# Altium PCB MB1367.PcbDoc (part 1 of 6)
Units mm, origin at the board's own origin, x right, y up, seen from the top; angles counter-clockwise.
Board outline 70 x 82.5 mm, 4 copper layers (Top Layer, Signal Layer 1, Signal Layer 2, Bottom Layer), stack 1.614 mm thick; 192 components, 143 nets, 810 pads, 920 vias.
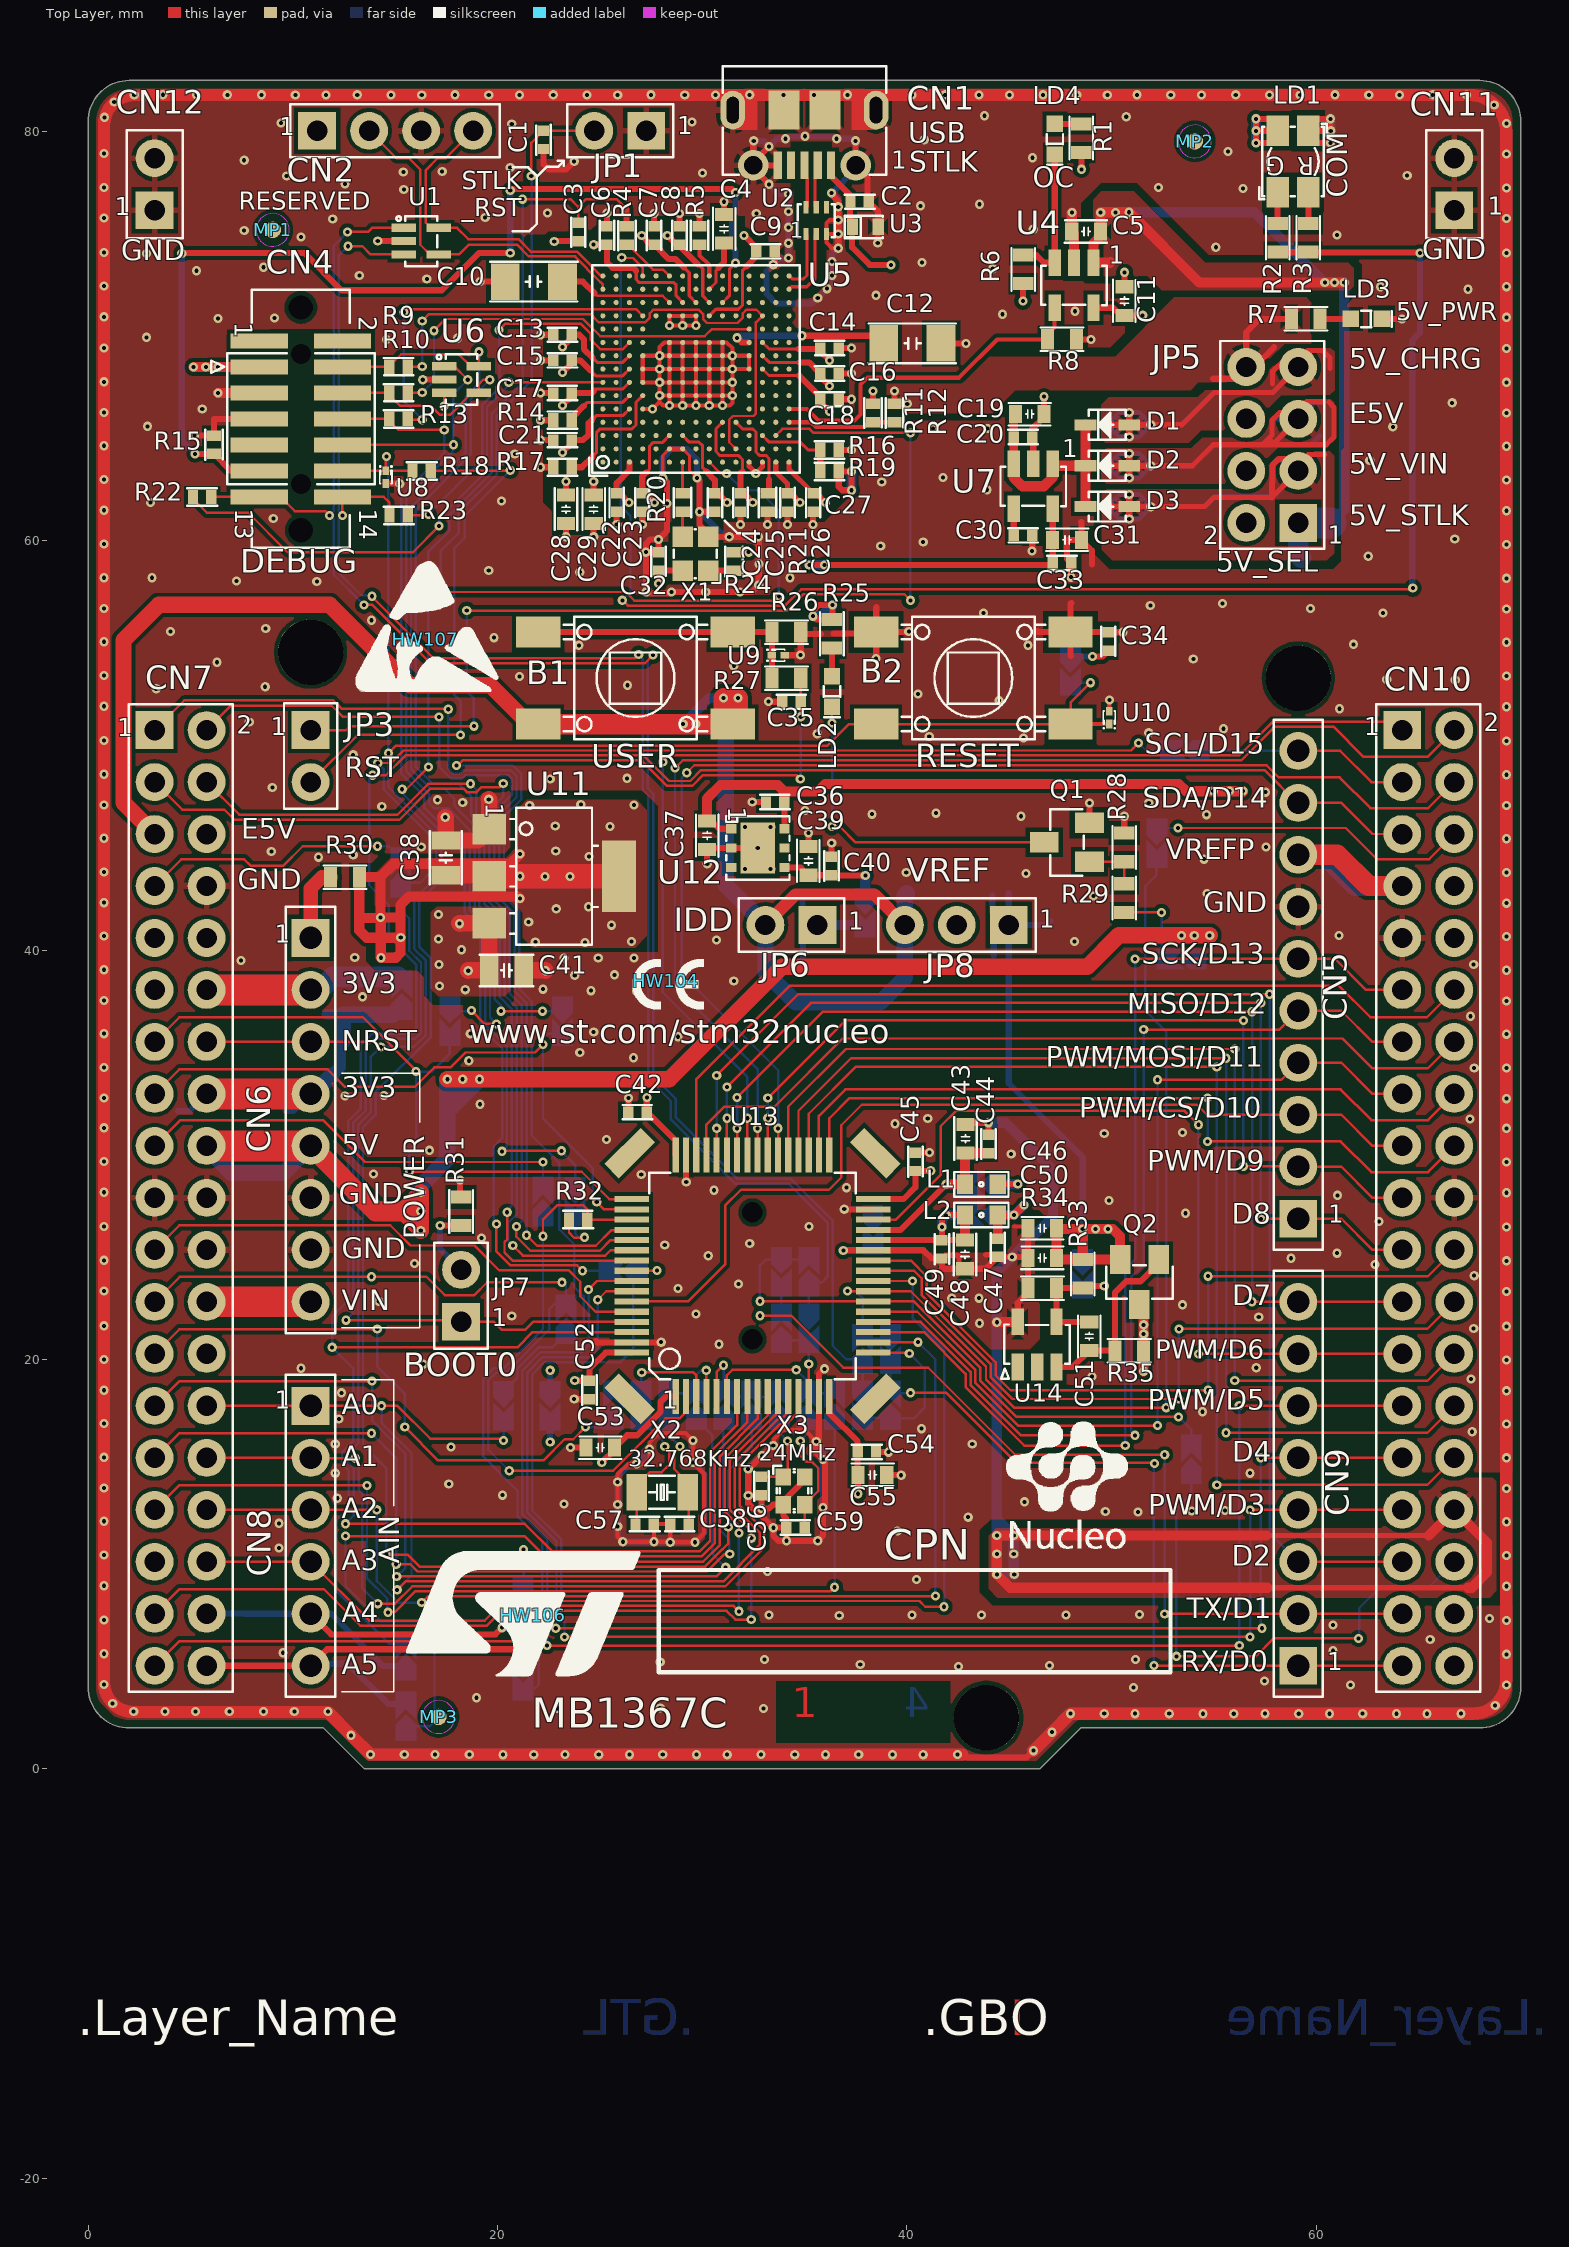
[diagram p0: Top Layer view]
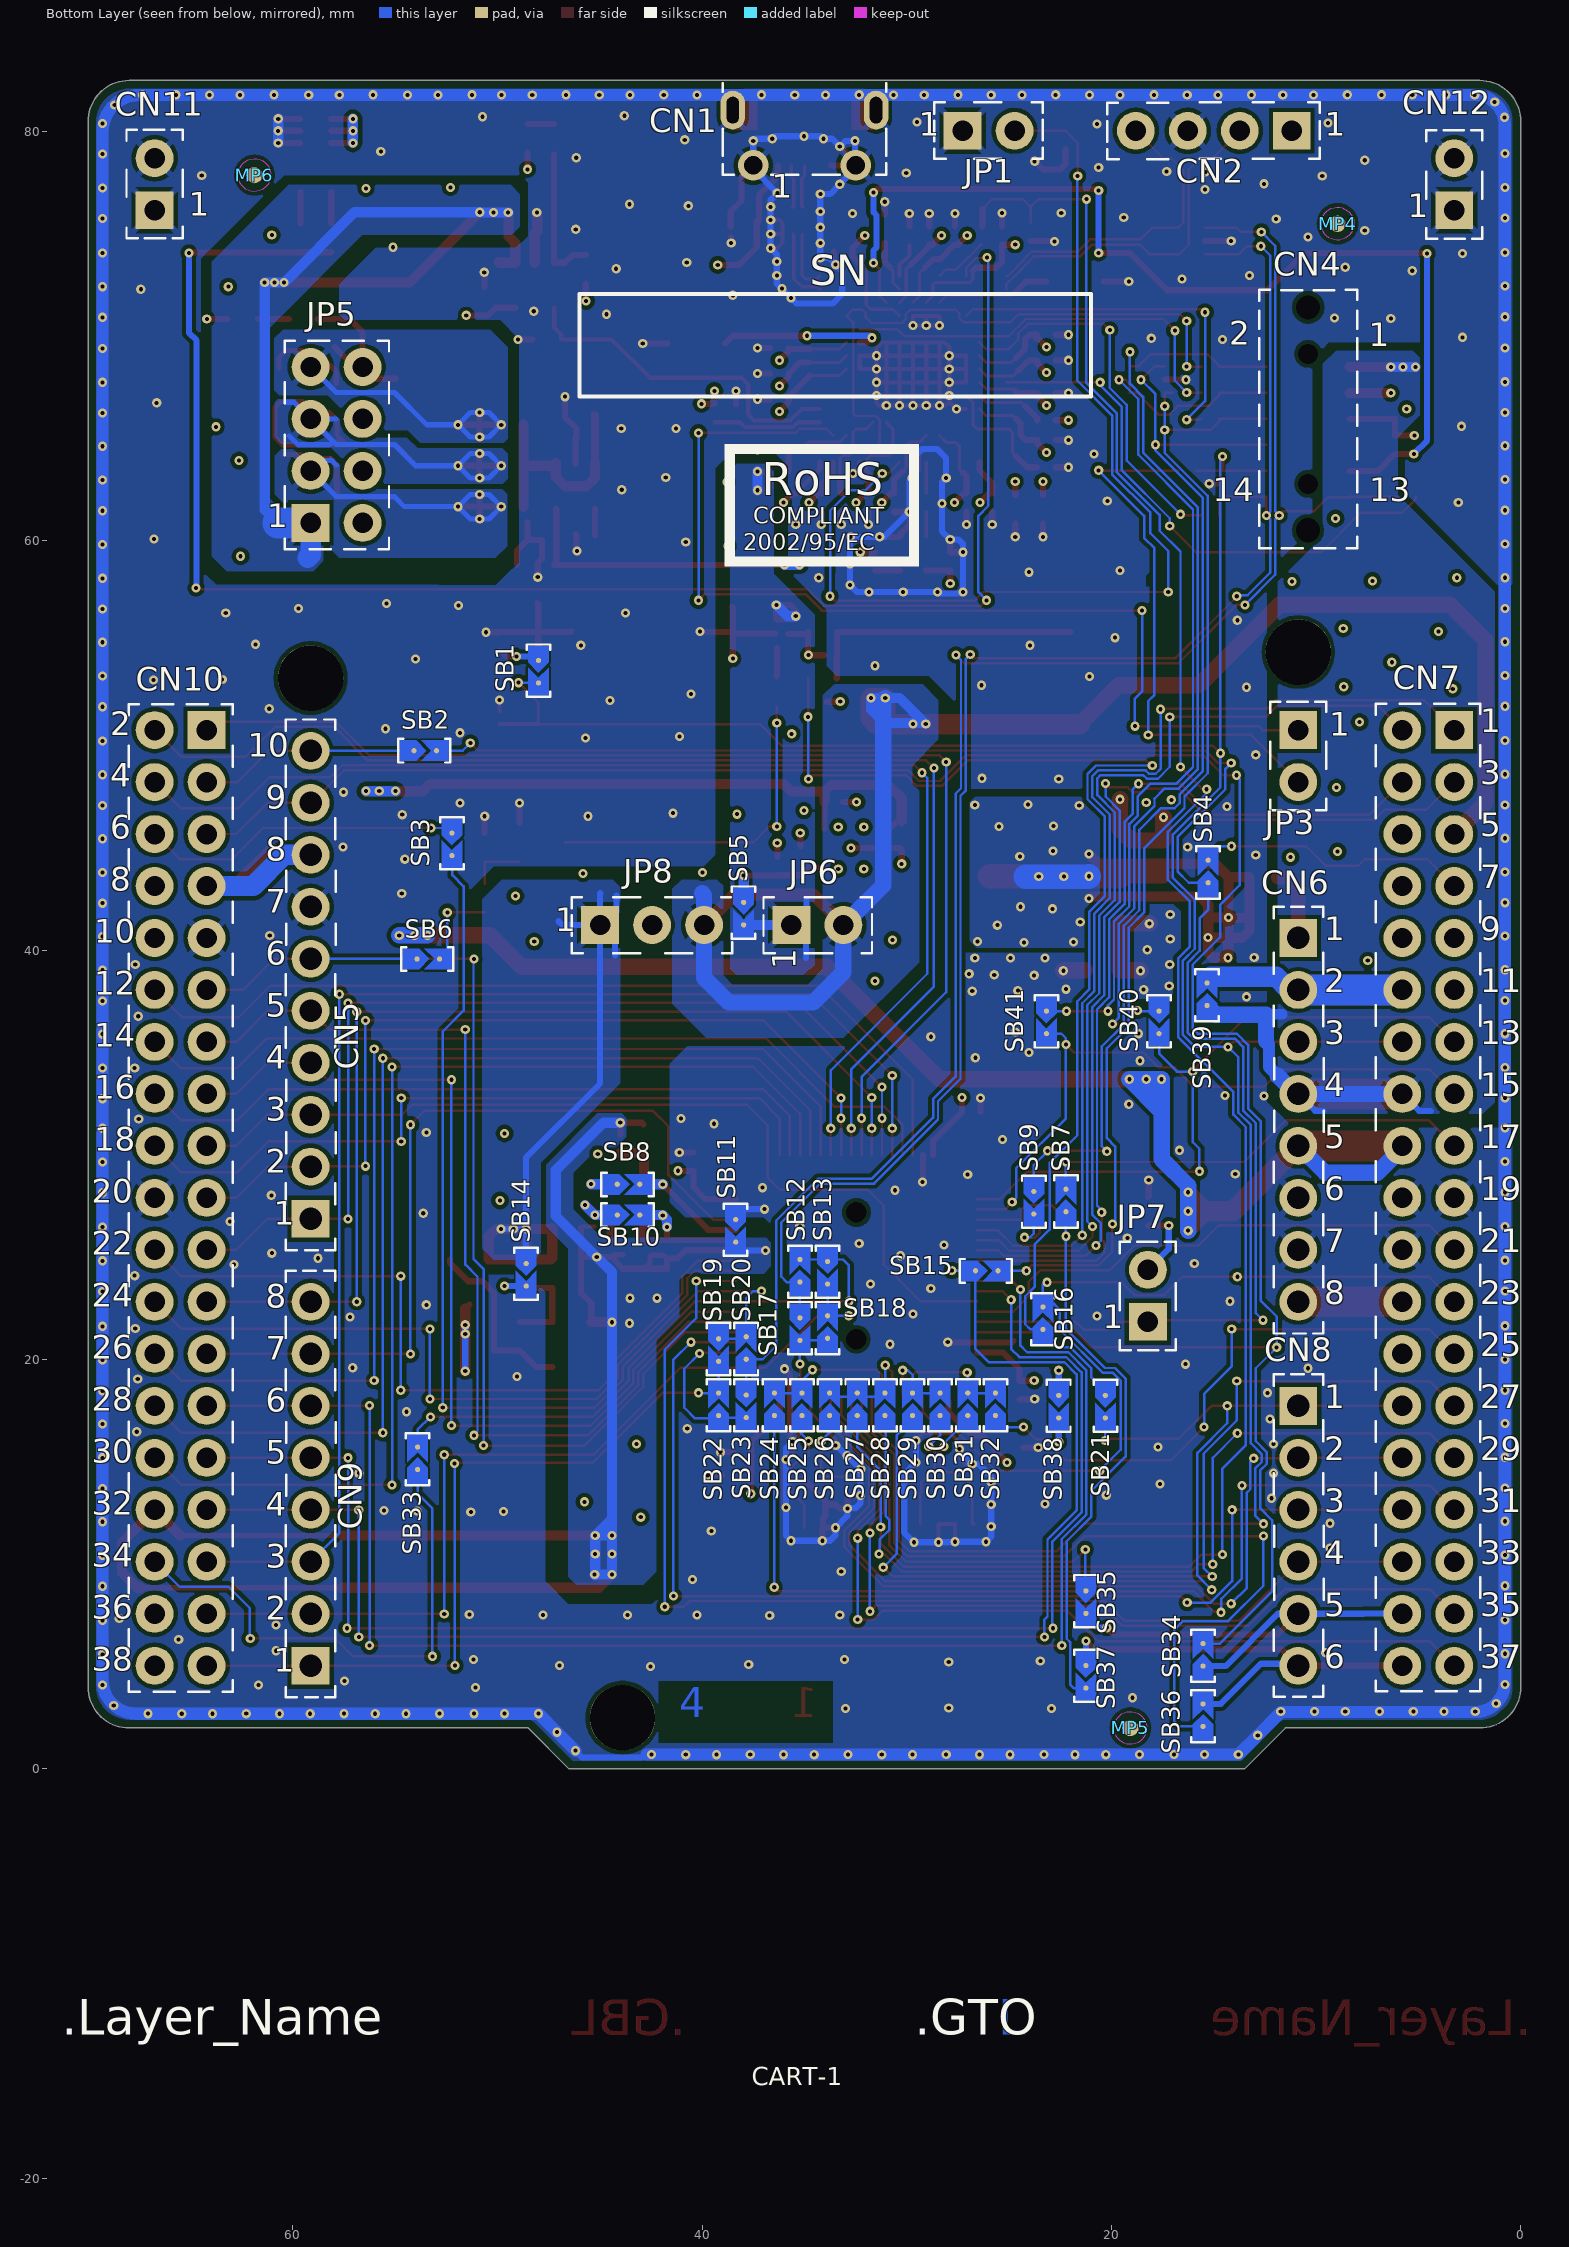
[diagram p1: Bottom Layer view, seen from below]
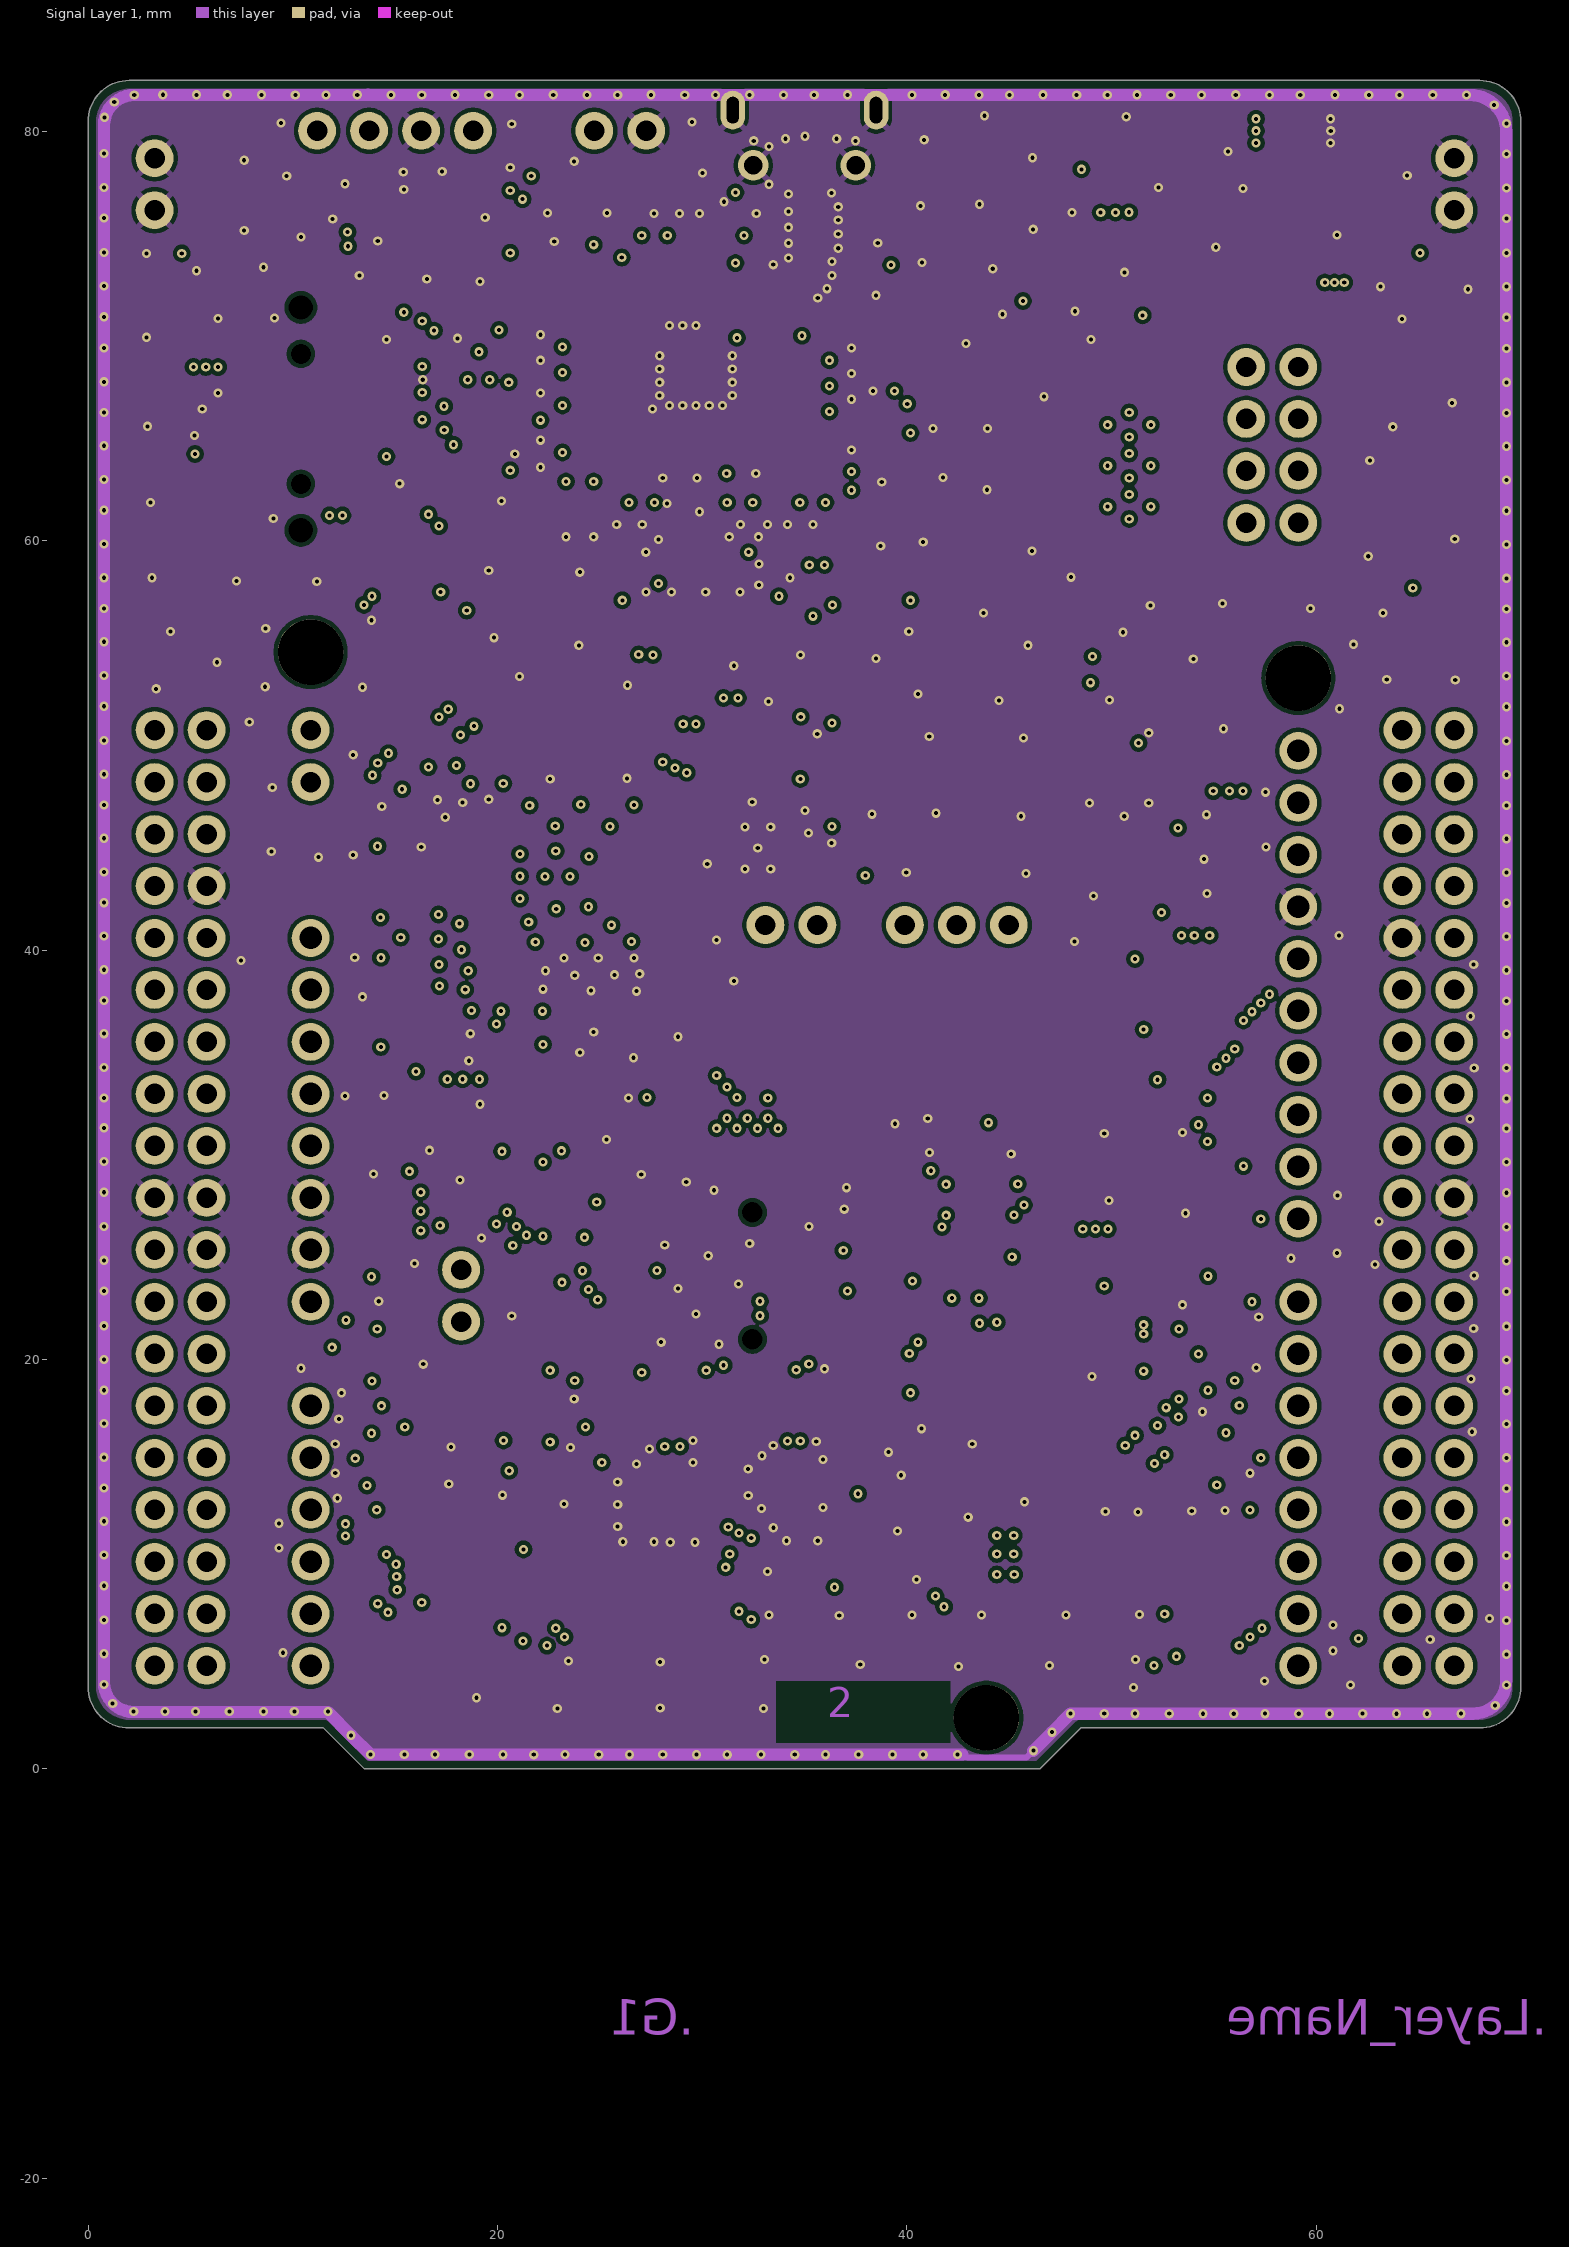
[diagram p2: Signal Layer 1]
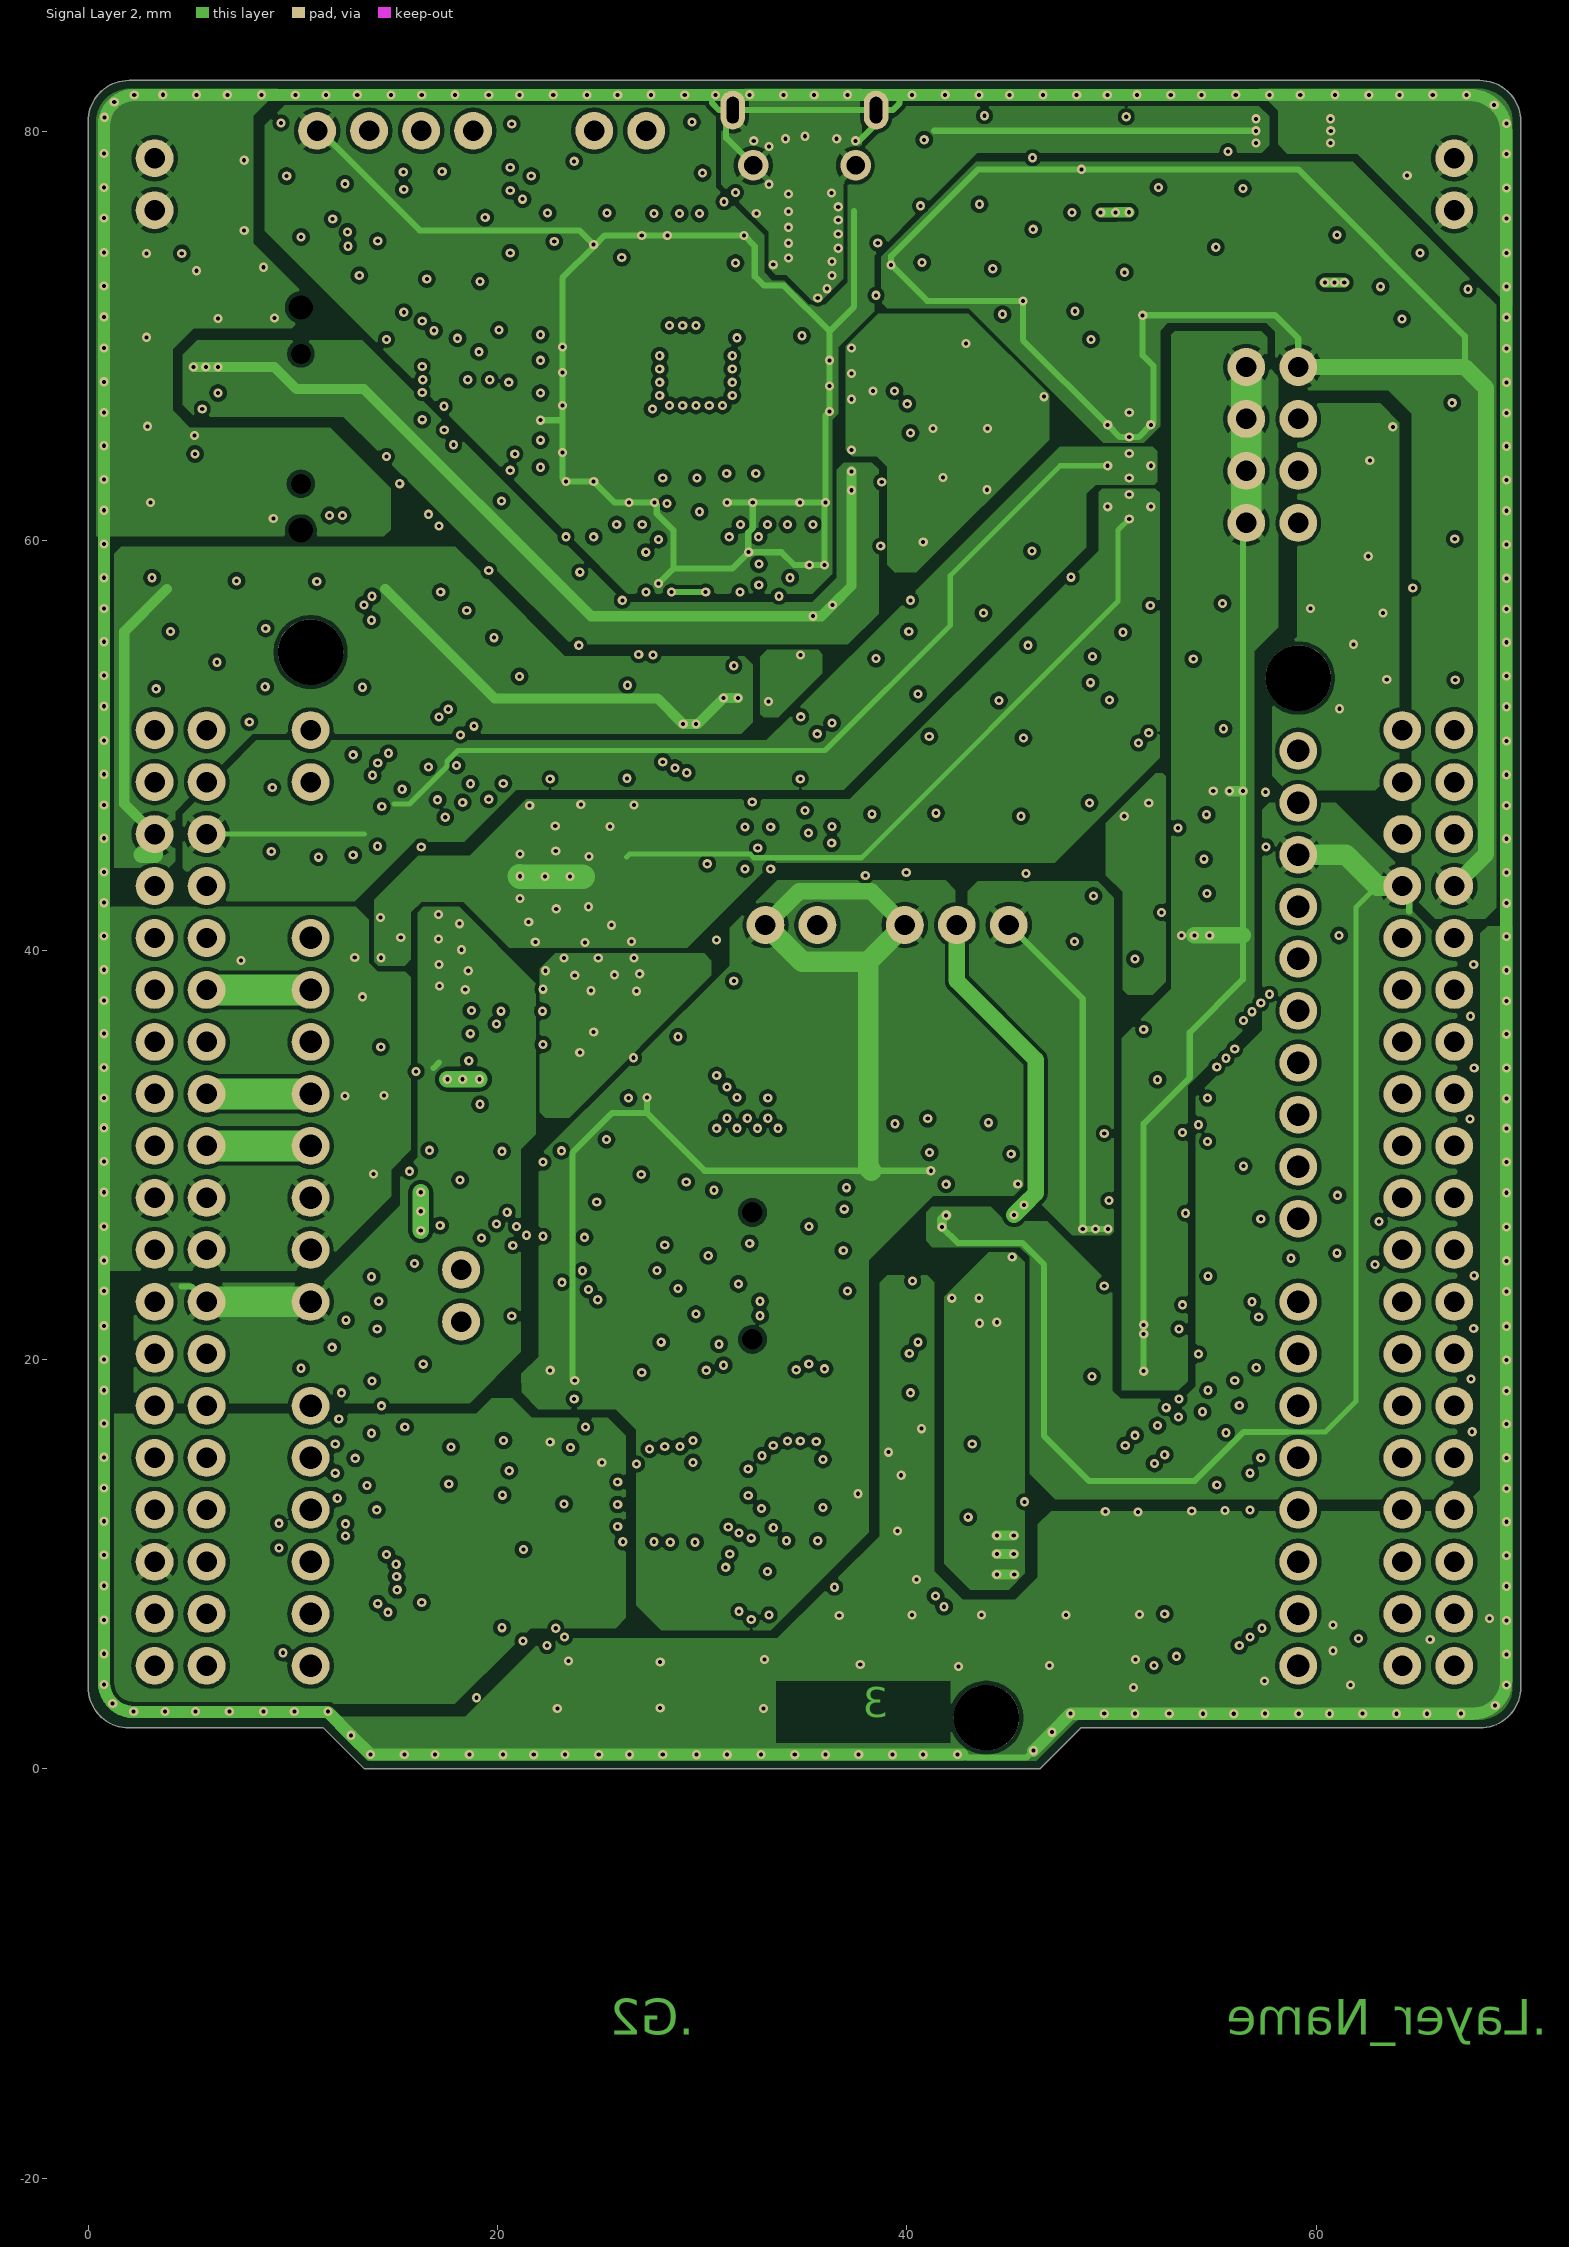
[diagram p3: Signal Layer 2]
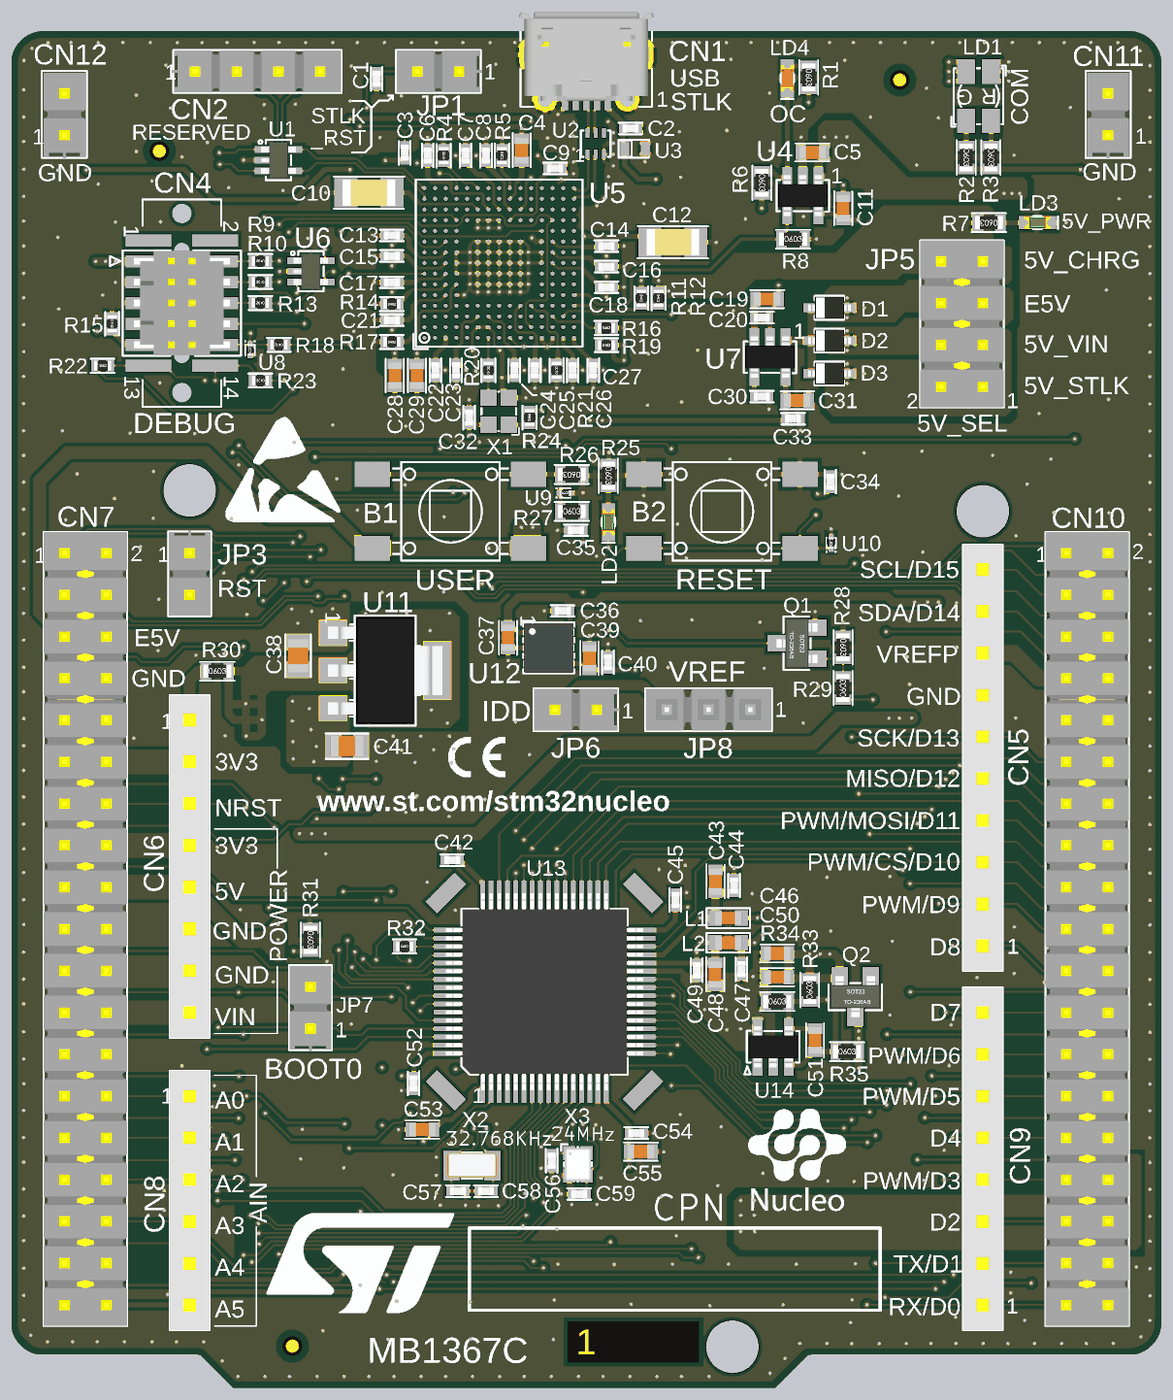
[diagram p8: 3D render of the assembled board from above, using the file's embedded part models]
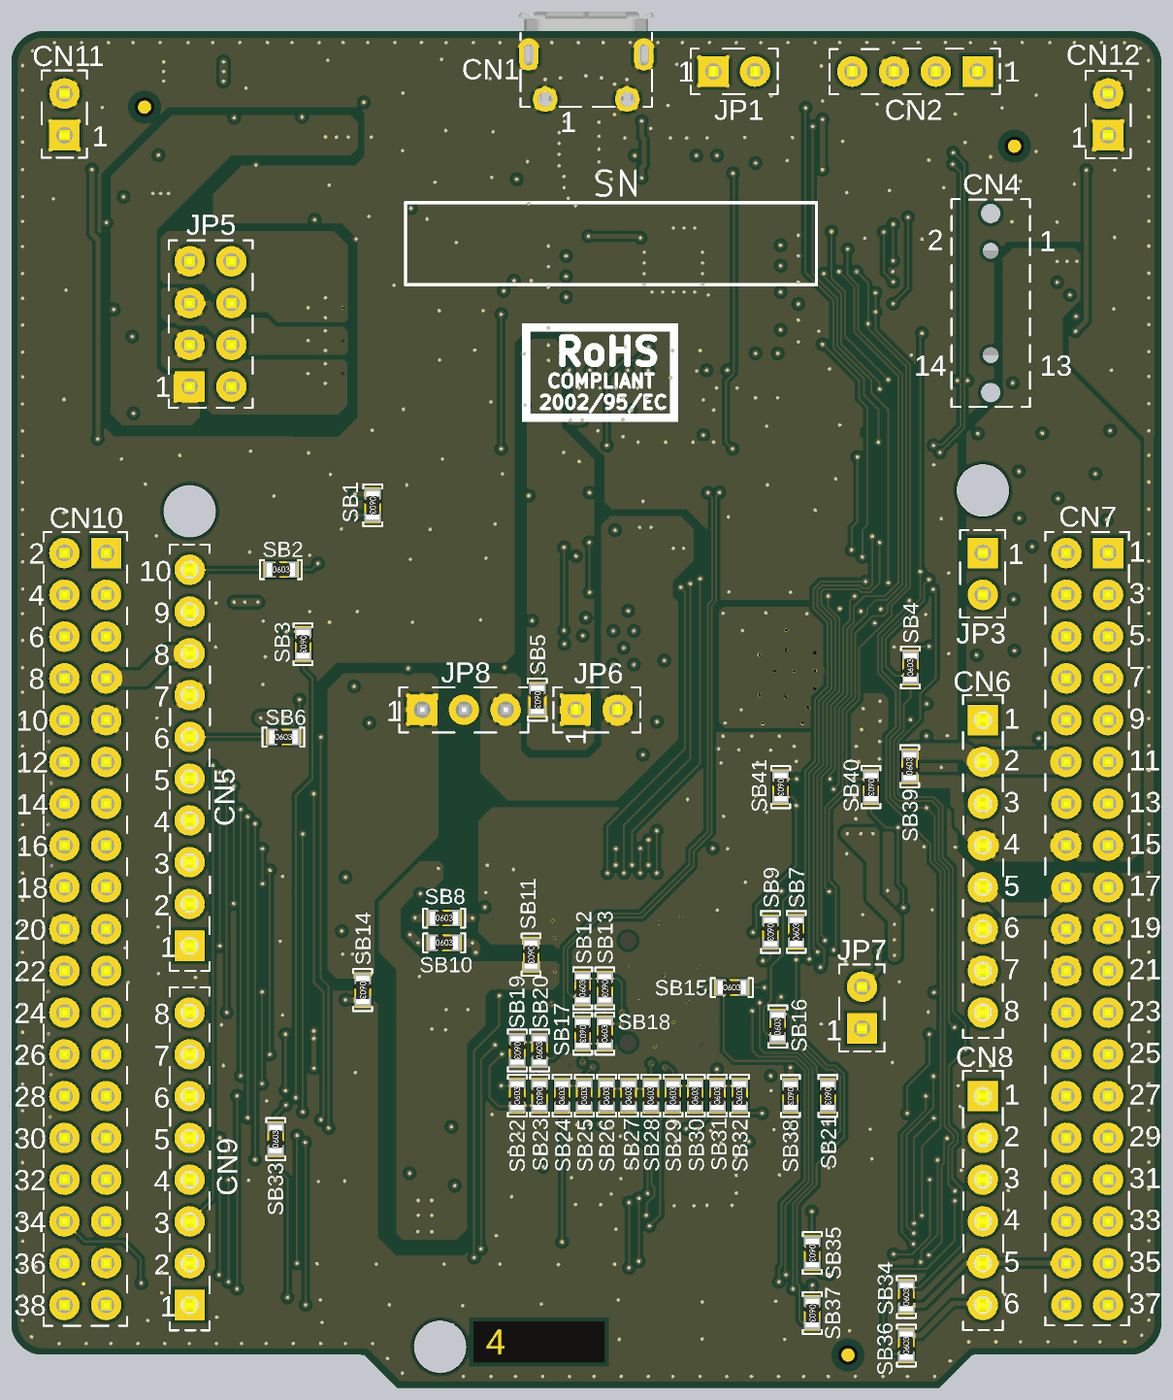
[diagram p9: 3D render of the assembled board from below, using the file's embedded part models]

## Layer stack, top to bottom
Top Solder: solder mask 0.015, Solder Resist, Dk 3.5
Top Layer: signal copper 0.042
Dielectric 1: prepreg 0.106, PP-IT-180A, Dk 4.2
Signal Layer 1: signal copper 0.035
Dielectric 2: core 1.248, FR4, Dk 4.2
Signal Layer 2: signal copper 0.035
Dielectric 3: prepreg 0.106, PP-IT-180A, Dk 4.2
Bottom Layer: signal copper 0.042
Bottom Solder: solder mask 0.015, Solder Resist, Dk 3.5

## Board outline
2,2 11.5,2 13.5,0 46.5,0 48.5,2 68,2 ccw(c68,4) 70,4 70,80.5 ccw(c68,80.5) 68,82.5 2,82.5 ccw(c2,80.5) 0,80.5 0,4 ccw(c2,4)

## Design rules (kind name [scope] priority, off if disabled: settings)
BoardOutlineClearance [All] p1: gap=0.4 ignorepadtopadclearanceinfootprint=FALSE
Clearance Clearance_USB [InNetClass('USB')] p1: gap=0.12 ignorepadtopadclearanceinfootprint=TRUE except(0.2: Arc-THPad Arc-Fill Track-THPad Track-Fill SMDPad-SMDPad SMDPad-THPad SMDPad-Fill THPad-THPad THPad-Fill Via-Fill Fill-Fill; 0.5: Arc-Poly Track-Poly SMDPad-Poly THPad-Poly Via-Poly Fill-Poly Poly-Poly)
Clearance [All] p2: gap=0.12 ignorepadtopadclearanceinfootprint=TRUE except(0.2: Arc-THPad Arc-Fill Arc-Poly Track-THPad Track-Fill Track-Poly SMDPad-SMDPad SMDPad-THPad SMDPad-Fill SMDPad-Poly THPad-THPad THPad-Fill THPad-Poly Via-Fill Via-Poly Fill-Fill Fill-Poly Poly-Poly)
ComponentClearance [All] p1 off: gap=0.025 collisioncheckmode=3 verticalgap=2540 showdistances=TRUE
DiffPairsRouting DiffPairsRouting_USB [InDifferentialPairClass('DIFF_USB')] p1: maxlimit=0.226 minlimit=0.226 mostfreqgap=0.226 toplayer_minwidth=0.16 toplayer_maxwidth=0.16 toplayer_prefwidth=0.16 midlayer1_minwidth=0.16 midlayer1_maxwidth=0.16 midlayer1_prefwidth=0.16 midlayer2_minwidth=0.16 midlayer2_maxwidth=0.16 midlayer2_prefwidth=0.16 bottomlayer_minwidth=0.16 bottomlayer_maxwidth=0.16 bottomlayer_prefwidth=0.16 maxuncoupledlength=50
FanoutControl Fanout_BGA [IsBGA] p1: bgadir=Out bgaviamode=Closest fanoutstyle=Auto fanoutdirection=Alternating viagrid=0.025 // Fanout_BGA (Default Rule)
FanoutControl Fanout_LCC [IsLCC] p2: bgadir=Out bgaviamode=Closest fanoutstyle=Auto fanoutdirection=Alternating viagrid=0.025 // Fanout_LCC (Default Rule)
FanoutControl Fanout_SOIC [IsSOIC] p3: bgadir=Out bgaviamode=Closest fanoutstyle=Auto fanoutdirection=Alternating viagrid=0.025 // Fanout_SOIC (Default Rule)
FanoutControl Fanout_Small [(CompPinCount < 5)] p4: bgadir=Out bgaviamode=Closest fanoutstyle=Auto fanoutdirection=OutThenIn viagrid=0.025 // Fanout_Small (Default Rule)
FanoutControl Fanout_Default [All] p5: bgadir=Out bgaviamode=Closest fanoutstyle=Auto fanoutdirection=Alternating viagrid=0.025 // Fanout_Default (Default Rule)
Height [All] p1 off: minheight=0 maxheight=100 prefheight=0.5
HoleSize [All] p1: absolutevalues=TRUE maxlimit=10 minlimit=0.15 maxpercent=80.000 minpercent=20.000
HoleToHoleClearance [All] p1: gap=0.25 allowstackedmicrovias=TRUE
Length Length_USB [InNetClass('USB')] p1: maxlimit=50 minlimit=1
MatchedLengths [InDifferentialPairClass('DIFF_USB')] p1: tolerance=0.2 checknetsindiffpair=TRUE checkdiffpairvsdiffpair=FALSE checkxsignals=FALSE checkothers=FALSE
MinimumSolderMaskSliver [All] p1: minsoldermaskwidth=0
PlaneClearance [All] p1: clearance=0.6
PolygonConnect PolygonConnect_6 [All vs IsNamedPolygon('GND_L01_P086')] p1: thpad.connectstyle=Relief thpad.reliefconductorwidth=0.3 thpad.reliefentries=4 thpad.polygonreliefangle="90 Angle" thpad.airgapwidth=0.2 smdpad.connectstyle=NoConnect smdpad.reliefconductorwidth=0.254 smdpad.reliefentries=4 smdpad.polygonreliefangle="90 Angle" smdpad.airgapwidth=0.254 via.connectstyle=Direct via.reliefconductorwidth=0.254 via.reliefentries=4 via.polygonreliefangle="90 Angle" via.airgapwidth=0.254
PolygonConnect PolygonConnect_5 [All vs IsNamedPolygon('GND_L01_P084')] p2: thpad.connectstyle=Relief thpad.reliefconductorwidth=0.3 thpad.reliefentries=4 thpad.polygonreliefangle="90 Angle" thpad.airgapwidth=0.2 smdpad.connectstyle=NoConnect smdpad.reliefconductorwidth=0.254 smdpad.reliefentries=4 smdpad.polygonreliefangle="90 Angle" smdpad.airgapwidth=0.254 via.connectstyle=Direct via.reliefconductorwidth=0.254 via.reliefentries=4 via.polygonreliefangle="90 Angle" via.airgapwidth=0.254
PolygonConnect PolygonConnect_4 [All vs IsNamedPolygon('GND_L01_P082')] p3: thpad.connectstyle=Relief thpad.reliefconductorwidth=0.3 thpad.reliefentries=4 thpad.polygonreliefangle="90 Angle" thpad.airgapwidth=0.2 smdpad.connectstyle=NoConnect smdpad.reliefconductorwidth=0.254 smdpad.reliefentries=4 smdpad.polygonreliefangle="90 Angle" smdpad.airgapwidth=0.254 via.connectstyle=Direct via.reliefconductorwidth=0.254 via.reliefentries=4 via.polygonreliefangle="90 Angle" via.airgapwidth=0.254
PolygonConnect PolygonConnect_3 [All vs IsNamedPolygon('GND_L01_P010')] p4: thpad.connectstyle=Relief thpad.reliefconductorwidth=0.3 thpad.reliefentries=4 thpad.polygonreliefangle="90 Angle" thpad.airgapwidth=0.2 smdpad.connectstyle=Direct smdpad.reliefconductorwidth=0.254 smdpad.reliefentries=4 smdpad.polygonreliefangle="90 Angle" smdpad.airgapwidth=0.254 via.connectstyle=Direct via.reliefconductorwidth=0.254 via.reliefentries=4 via.polygonreliefangle="90 Angle" via.airgapwidth=0.254
PolygonConnect PolygonConnect_2 [All vs IsNamedPolygon('VIN_L01_P008')] p5: thpad.connectstyle=Relief thpad.reliefconductorwidth=0.3 thpad.reliefentries=4 thpad.polygonreliefangle="90 Angle" thpad.airgapwidth=0.2 smdpad.connectstyle=Direct smdpad.reliefconductorwidth=0.254 smdpad.reliefentries=4 smdpad.polygonreliefangle="90 Angle" smdpad.airgapwidth=0.254 via.connectstyle=Direct via.reliefconductorwidth=0.254 via.reliefentries=4 via.polygonreliefangle="90 Angle" via.airgapwidth=0.254
PolygonConnect PolygonConnect_1 [All vs IsNamedPolygon('5V_VIN_L01_P004')] p6: thpad.connectstyle=Relief thpad.reliefconductorwidth=0.3 thpad.reliefentries=4 thpad.polygonreliefangle="90 Angle" thpad.airgapwidth=0.2 smdpad.connectstyle=Direct smdpad.reliefconductorwidth=0.254 smdpad.reliefentries=4 smdpad.polygonreliefangle="90 Angle" smdpad.airgapwidth=0.254 via.connectstyle=Direct via.reliefconductorwidth=0.254 via.reliefentries=4 via.polygonreliefangle="90 Angle" via.airgapwidth=0.254
PolygonConnect [All vs IsNamedPolygon('GND_L01_P006')] p7: thpad.connectstyle=Relief thpad.reliefconductorwidth=0.3 thpad.reliefentries=4 thpad.polygonreliefangle="90 Angle" thpad.airgapwidth=0.2 smdpad.connectstyle=Direct smdpad.reliefconductorwidth=0.254 smdpad.reliefentries=4 smdpad.polygonreliefangle="90 Angle" smdpad.airgapwidth=0.254 via.connectstyle=Direct via.reliefconductorwidth=0.254 via.reliefentries=4 via.polygonreliefangle="90 Angle" via.airgapwidth=0.254
PolygonConnect PolygonConnect__DEFAULT [All] p8: thpad.connectstyle=Relief thpad.reliefconductorwidth=0.3 thpad.reliefentries=4 thpad.polygonreliefangle="45 Angle" thpad.airgapwidth=0.2 smdpad.connectstyle=Relief smdpad.reliefconductorwidth=0.3 smdpad.reliefentries=4 smdpad.polygonreliefangle="45 Angle" smdpad.airgapwidth=0.2 via.connectstyle=Direct via.reliefconductorwidth=0.254 via.reliefentries=4 via.polygonreliefangle="45 Angle" via.airgapwidth=0.254
RoutingVias [All] p1: holewidth=0.2 width=0.45 viastyle="Through Hole" minholewidth=0.2 minwidth=0.45 maxholewidth=0.2 maxwidth=0.45
SilkToSilkClearance [All] p1: silktosilkclearance=0
SilkToSolderMaskClearance [IsPad] p1: minsilkscreentomaskgap=0 clearancetoexposedcopper=TRUE
SolderMaskExpansion [All] p1: expansion=0.05
Width Width_ALIMS [InNetClass('ALIMS')] p1: maxlimit=10 minlimit=0.12 preferedwidth=0.3
Width Width_GND [InNetClass('GND')] p2: maxlimit=10 minlimit=0.12 preferedwidth=0.3 minimp=50.000000 maximp=50.000000 favimp=50.000000
Width [All] p3: maxlimit=10 minlimit=0.12 preferedwidth=0.12
16 further rules are at their usual default settings.

## Classes and differential pairs
differential pair class DIFF_USB: USB_DEV_HS USB_DEV_HS_CN
net class ALIMS: 3V3 3V3_STLK 5V 5V_USB_CHGR 5V_USB_STLK 5V_VIN E5V VDD VIN VREF VREFP
net class GND: AGND AVDD GND GNDDetect
net class USB: USB_DEV_HS_CN_N USB_DEV_HS_CN_P USB_DEV_HS_N USB_DEV_HS_P
differential pair USB_DEV_HS: +USB_DEV_HS_P -USB_DEV_HS_N
differential pair USB_DEV_HS_CN: +USB_DEV_HS_CN_P -USB_DEV_HS_CN_N

## Components (designator, comment, footprint, x,y, rotation, side; value= is the part's Value field where it differs from the comment)
B1 "" SWI_WEALTHMETAL_TD-0341_4P_BLUE 26.745,53.3 r90 top locked value=SW_BLUE
B2 "" SWI_WEALTHMETAL_TD-0341_4P_BLACK 43.255,53.3 r90 top locked value=SW_BLACK
C1 "" C0402 22.25,79.6 r90 top value=100nF
C2 "" C0402 37.7,76.575 r180 top value=100pF
C3 "" C0402 23.95,75.1 r90 top value=20pF
C4 "" C0603 31.075,75.25 r270 top value=2.2uF
C5 "" C0603 48.76,75.12 r0 top value=1uF
C6 "" C0402 25.35,74.925 r270 top value=100nF
C7 "" C0402 27.65,74.925 r270 top value=100nF
C8 "" C0402 28.9,74.925 r270 top value=100nF
C9 "" C0402 33.1,74.15 r180 top value=100nF
C10 "" C1206_H1P15 21.775,72.675 r0 top value=2.2uF
C11 "" C0603 50.635,71.72 r270 top value=1uF
C12 "" C1206_H1P15 40.275,69.65 r180 top value=2.2uF
C13 "" C0402 23.175,70.075 r0 top value=100nF
C14 "" C0402 36.225,69.425 r180 top value=100nF
C15 "" C0402 23.175,68.825 r0 top value=100nF
C16 "" C0402 36.225,68.175 r180 top value=100nF
C17 "" C0402 23.175,67.225 r0 top value=100nF
C18 "" C0402 36.225,66.925 r180 top value=100nF
C19 "" C0603 46.005,66.2 r180 top value=1uF
C20 "" C0402 45.68,65.075 r180 top value=100nF
C21 "" C0402 23.175,64.925 r0 top value=100nF
C22 "" C0402 25.825,61.875 r90 top value=100nF
C23 "" C0402 27.075,61.875 r90 top value=100nF
C24 "" C0402 30.625,61.875 r90 top value=100nF
C25 "" C0402 31.875,61.875 r90 top value=100nF
C26 "" C0402 34.175,61.875 r90 top value=100nF
C27 "" C0402 35.425,61.875 r90 top value=100nF
C28 "" C0603 23.35,61.55 r90 top value=4.7uF
C29 "" C0603 24.7,61.55 r90 top value=1uF
C30 "" C0402 45.68,60.275 r180 top value=10nF
C31 "" C0603 47.83,60.05 r180 top value=1uF
C32 "" C0402 27.875,59 r270 top value=100nF
C33 "" C0402 47.58,58.925 r180 top value=100nF
C34 "" C0402 49.845,55.09 r270 top value=100nF
C35 "" C0402 34.37,52.14 r0 top value=100nF
C36 "" C0402 33.57,47.24 r0 top value=100nF
C37 "" C0603 30.245,45.615 r90 top value=1uF
C38 "" C0805 17.47,44.515 r270 top value=10uF
C39 "" C0603 35.195,44.365 r270 top value=1uF
C40 "" C0402 36.32,44.115 r270 top value=100nF
C41 "" C0805 20.445,39.015 r180 top value=10uF
C42 "" C0402 26.845,32.09 r0 top value=100nF
C43 "" C0603 42.87,30.79 r270 top value=1uF
C44 "" C0402 43.995,30.54 r270 top value=100nF
C45 "" C0402 40.42,29.665 r270 top value=100nF
C46 "Capacitor" C0603 46.62,26.415 r0 top value=10uF
C47 "" C0402 44.445,25.465 r90 top value=100nF
C48 "" C0603 42.845,25.14 r270 top value=1uF
C49 "" C0402 41.72,25.39 r270 top value=100nF
C50 "" C0603 46.62,24.965 r0 top value=100nF
C51 "Capacitor" C0603 48.92,21.14 r90 top value=100pF
C52 "" C0402 24.495,18.515 r90 top value=100nF
C53 "" C0603 25.025,15.7 r0 top value=1uF
C54 "" C0402 38.045,15.49 r180 top value=100nF
C55 "" C0603 38.32,14.365 r180 top value=4.7uF
C56 "" C0402 32.895,13.815 r90 top value=6.8pF
C57 "" C0402 27.195,11.965 r0 top value=5.1pF
C58 "" C0402 28.895,11.965 r180 top value=5.1pF
C59 "" C0402 34.57,11.79 r0 top value=6.8pF
CART-1 "Comment" Sheetbox_4L2S 80.3,-25.275 r180 bottom
CN1 "" CON_USBMICROB_MOLEX_105017-0001_H2P90 35,82.5 r180 top locked value=USB_uB_105017-0001
CN2 "" CON_SAMTEC_TSW-104-07-G-S 15,80.04 r0 top value="Header 4x1"
CN4 "Header 7x2" CON_STDC14_Receiver_MEDIUM_WITH_MIPI10_3D 10.395,65.965 r270 top locked value="MIPI10 on STDC14 footprint"
CN5 "" CON_SAMTEC_SSW-110-03-X-S 59.13,38.314 r90 top locked value="Socket 10x1"
CN6 "" CON_SAMTEC_SSW-108-03-X-S 10.87,31.71 r270 top locked value="Socket 8x1"
CN7 "" CON_SAMTEC_TSW-119-09-X-D 4.52,27.9 r270 top locked value="Header 19x2"
CN8 "" CON_SAMTEC_SSW-106-03-X-S 10.87,11.39 r270 top locked value="Socket 6x1"
CN9 "" CON_SAMTEC_SSW-108-03-X-S 59.13,13.93 r90 top value="Socket 8x1"
CN10 "" CON_SAMTEC_TSW-119-09-X-D 65.48,27.9 r270 top locked value="Header 19x2"
CN11 "" CON_SAMTEC_TSW-102-09-X-S 66.75,77.43 r90 top value="Header 2x1 16mm"
CN12 "" CON_SAMTEC_TSW-102-09-X-S 3.25,77.43 r90 top locked value="Header 2x1 16mm"
D1 "" DIO_SOD323 49.8,65.675 r180 top value=BAT60JFILM
D2 "" DIO_SOD323 49.8,63.675 r180 top value=BAT60JFILM
D3 "" DIO_SOD323 49.8,61.675 r180 top value=BAT60JFILM
HW104 "" LOGO_CE 28.225,38.5 r0 top value="LOGO CE"
HW106 "" LOGO_ST 21.725,7.5 r0 top value="LOGO ST"
HW107 "" LOGO_MAIN_1 16.475,55.2 r0 top value="LOGO ESD"
JP1 "" CON_SAMTEC_TSW-102-07-G-S 26,80.04 r180 top value="Shunt not fitted"
JP3 "Shunt Fitted" CON_SAMTEC_TSW-102-07-G-S 10.87,49.49 r270 top locked
JP5 "Shunt Fitted 1-2" CON_SAMTEC_TSW-104-07-X-D 57.86,64.69 r90 top
JP6 "Shunt Fitted" CON_SAMTEC_TSW-102-07-G-S 34.365,41.235 r180 top
JP7 "" CON_SAMTEC_TSW-102-07-G-S 18.22,23.12 r90 top value="Shunt not fitted"
JP8 "Shunt Fitted 1-2" CON_SAMTEC_TSW-103-07-F-S 42.445,41.235 r180 top locked
L1 "" L0603 43.645,28.565 r180 top value=600R@100MHz
L2 "" L0603 43.645,27.065 r180 top value=600R@100MHz
LD1 "" LED_BI-GR_HSMF-A201-A00J1 58.87,78.54 r180 top value=LD_BICOLOR_CMS
LD2 "" LED_0603_GREEN 36.345,52.64 r270 top value=GREEN
LD3 "" LED_0603_GREEN 62.45,70.85 r0 top value=GREEN
LD4 "" LED_0603_RED 47.233,79.63 r270 top value=RED
MP1 "MP1" MIRE_PLACE_SMD_0P8MM 9.025,75.2 r0 top
MP2 "MP2" MIRE_PLACE_SMD_0P8MM 54.075,79.525 r0 top
MP3 "MP3" MIRE_PLACE_SMD_0P8MM 17.12,2.54 r0 top
MP4 "Comment" MIRE_PLACE_SMD_0P8MM 8.95,75.5 r180 bottom
MP5 "Comment" MIRE_PLACE_SMD_0P8MM 19.075,2 r180 bottom
MP6 "Comment" MIRE_PLACE_SMD_0P8MM 61.875,77.875 r180 bottom
Q1 "" NPN_SOT23 47.825,45.275 r90 top value=9013-SOT23
Q2 "" NPN_SOT23 51.37,23.79 r180 top value=9013-SOT23
R1 "" R0603 48.533,79.68 r270 top value=1K
R2 "" R0603 58.12,74.815 r270 top value=330R
R3 "" R0603 59.62,74.815 r270 top value=330R
R4 "" R0402 26.325,74.925 r90 top value=100R
R5 "" R0402 29.875,74.925 r270 top value=3K
R6 "" R0603 45.685,73.27 r270 top value=100K
R7 "" R0603 59.5,70.85 r180 top value=510R
R8 "" R0603 47.585,69.845 r0 top value=10K
R9 "Resistor" R0402 15.17,68.515 r180 top value=47R
R10 "Resistor" R0402 15.17,67.24 r180 top value=47R
R11 "" R0402 38.35,66.25 r270 top value=4K7
R12 "" R0402 39.4,66.25 r270 top value=2K7
R13 "Resistor" R0402 15.17,65.965 r180 top value=47R
R14 "" R0402 23.175,65.9 r0 top value=10K
R15 "" R0402 6.15,64.7 r270 top value=100R
R16 "" R0402 36.225,64.45 r0 top value=4K7
R17 "" R0402 23.175,63.6 r0 top value=10K
R18 "Resistor" R0402 16.3,63.425 r180 top value=47R
R19 "" R0402 36.225,63.4 r0 top value=4K7
R20 "" R0402 29.05,61.875 r90 top value=100R
R21 "" R0402 33.2,61.875 r90 top value=10K
R22 "Resistor" R0402 5.575,62.15 r0 top value=47R
R23 "Resistor" R0402 15.175,61.25 r180 top value=47R
R24 "" R0402 31.55,59 r270 top value=10K
R25 "" R0603 36.345,55.465 r270 top value=510R
R26 "" R0603 34.12,55.54 r180 top value=100K
R27 "" R0603 34.12,53.29 r0 top value=330R
R28 "" R0603 50.625,45.025 r270 top value=100K
R29 "" R0603 50.625,42.55 r90 top value=47K
R30 "" R0603 12.55,43.575 r0 top value=1K
R31 "" R0603 18.22,27.245 r270 top value=10K
R32 "" R0402 23.945,26.84 r0 top value=22R
R33 "​Add 0.5% tolerance resistor" R0603 48.595,24.19 r90 top value="10K - 0.5%"
R34 "​add 0.5% tolerance resistor" R0603 46.62,23.49 r0 top value="33K - 0.5%"
R35 "" R0603 50.87,20.44 r0 top value=820R
SB1 "" SOLDER-BRIDGE_R0603-0R 47.995,53.665 r270 bottom
SB2 "" SOLDER-BRIDGE_R0603-0R 53.575,49.75 r180 bottom
SB3 "" SOLDER-BRIDGE_R0603-0R 52.225,45.225 r270 bottom
SB4 "" SOLDER-BRIDGE_R0603-0R 15.275,43.8 r90 bottom
SB5 "" SOLDER-BRIDGE_R0603-0R 37.97,41.84 r270 bottom
SB6 "" SOLDER-BRIDGE_R0603-0R 53.425,39.575 r180 bottom
SB7 "" SOLDER-BRIDGE_R0603-0R 22.225,27.725 r90 bottom
SB8 "" SOLDER-BRIDGE_R0603-0R 43.645,28.565 r180 bottom
SB9 "" SOLDER-BRIDGE_R0603-0R 23.795,27.715 r270 bottom
SB10 "" SOLDER-BRIDGE_R0603-0R 43.645,27.065 r180 bottom
SB11 "" SOLDER-BRIDGE_R0603-0R 38.36,26.34 r270 bottom
SB12 "" SOLDER-BRIDGE_R0603-0R 35.22,24.29 r90 bottom
SB13 "" SOLDER-BRIDGE_R0603-0R 33.87,24.29 r270 bottom
SB14 "" SOLDER-BRIDGE_R0603-0R 48.595,24.19 r270 bottom
SB15 "" SOLDER-BRIDGE_R0603-0R 26.145,24.34 r180 bottom
SB16 "" SOLDER-BRIDGE_R0603-0R 23.35,21.975 r90 bottom
SB17 "" SOLDER-BRIDGE_R0603-0R 35.22,21.54 r270 bottom
SB18 "" SOLDER-BRIDGE_R0603-0R 33.87,21.54 r90 bottom
SB19 "" SOLDER-BRIDGE_R0603-0R 39.195,20.515 r270 bottom
SB20 "" SOLDER-BRIDGE_R0603-0R 37.845,20.515 r90 bottom
SB21 "" SOLDER-BRIDGE_R0603-0R 20.3,17.75 r270 bottom
SB22 "" SOLDER-BRIDGE_R0603-0R 39.195,17.765 r90 bottom
SB23 "" SOLDER-BRIDGE_R0603-0R 37.845,17.765 r270 bottom
SB24 "" SOLDER-BRIDGE_R0603-0R 36.47,17.765 r90 bottom
SB25 "" SOLDER-BRIDGE_R0603-0R 35.12,17.765 r90 bottom
SB26 "" SOLDER-BRIDGE_R0603-0R 33.77,17.765 r90 bottom
SB27 "" SOLDER-BRIDGE_R0603-0R 32.42,17.765 r90 bottom
SB28 "" SOLDER-BRIDGE_R0603-0R 31.07,17.765 r90 bottom
SB29 "" SOLDER-BRIDGE_R0603-0R 29.72,17.765 r90 bottom
SB30 "" SOLDER-BRIDGE_R0603-0R 28.37,17.765 r90 bottom
SB31 "" SOLDER-BRIDGE_R0603-0R 27.02,17.765 r90 bottom
SB32 "" SOLDER-BRIDGE_R0603-0R 25.67,17.765 r90 bottom
SB33 "" SOLDER-BRIDGE_R0603-0R 53.9,15.125 r90 bottom
SB34 "" SOLDER-BRIDGE_R0603-0R 15.525,5.525 r90 bottom
SB35 "" SOLDER-BRIDGE_R0603-0R 21.25,8.2 r270 bottom
SB36 "" SOLDER-BRIDGE_R0603-0R 15.525,2.575 r90 bottom
SB37 "" SOLDER-BRIDGE_R0603-0R 21.25,4.55 r270 bottom
SB38 "" SOLDER-BRIDGE_R0603-0R 22.575,17.75 r270 bottom
SB39 "" SOLDER-BRIDGE_R0603-0R 15.325,37.8 r90 bottom
SB40 "" SOLDER-BRIDGE_R0603-0R 17.675,36.525 r270 bottom
SB41 "" SOLDER-BRIDGE_R0603-0R 23.175,36.525 r270 bottom
U1 "" ESD_SOT323-5L 16.275,74.65 r270 top value=ESDALC6V1W5
U2 "​" ESD_QFN-6L_1P7X1P5_P050 35.575,75.65 r0 top value=ECMF02-2AMX6
U3 "" ESD_QFN2_1P6X1_P125 37.975,75.35 r0 top value=ESDA7P60-1U1M
U4 "" MOS_SOT23-5L 48.175,72.495 r180 top value=STMPS2151STR
U5 "" ICC_UFBGA201_176+25_10X10_P065 29.7,68.4 r90 top locked value=ST-LINKV3E_SWD
U6 "" ESD_SOT323-5L 18.245,67.89 r270 top value=ESDALC6V1W5
U7 "" REG_SOT23-5L 46.18,62.675 r180 top value=LD3985M33R
U8 "" ESD_ST0201 14.545,63.115 r270 top value=ESDALC6V1-1U2
U9 "" ESD_ST0201 33.72,54.415 r0 top value=ESDALC6V1-1U2
U10 "" ESD_ST0201 49.895,51.365 r90 top value=ESDALC6V1-1U2
U11 "" REG_SOT223-TAB 22.77,43.615 r270 top value=LD1117S50TR
U12 "" ICC_DFN6-EPAD_3X3_P095 32.72,44.99 r270 top value=LD39050PU33R
U13 "STM32G4xx_LQFP64" ICC_LQFP64_10X10_P050_SOCKET_YAMAICHI_IC149-064-069-B5_NM 32.46,24.09 r0 top locked value=STM32G474RET6
U14 "" ICC_SOT23-5L_H1P45 46.37,20.74 r0 top value=TL1431ACL5T
X1 "" OSC_NDK_NZ2520SB_4P 29.675,59.375 r90 top value=25MHz
X2 "" CRY_NX3215SA_2P 28.045,13.515 r0 top value=NX3215SA-32.768K
X3 "" CRY_NX2016SA_4P 34.495,13.59 r270 top value=24MHz

## Footprints (in the part's own frame and the unit in brackets; to place one, negate y for a bottom-side part, rotate by r counter-clockwise, add the part's x,y. Pads: shape width x height; smd on the part's side, far side on the other; paste and mask are expansions set on the pad)
C0402 [mm]
  rect 0.51x0.56 smd mask+0.05: 1(-0.45,0) 2(0.45,0)
  silkscreen extent -0.72,-0.35 0.72,0.35, body extent -0.5,-0.3 0.5,0.3, height 0.4
C0603 [mm]
  rect 0.64x0.89 smd mask+0.05: 1(-0.7,0) 2(0.7,0)
  silkscreen extent -1.05,-0.55 1.02,0.55, body extent -0.9,-0.5 0.9,0.5, height 1.4
C0805 [mm]
  rect 0.9x1.4 smd mask+0.05: 1(-0.85,0) 2(0.85,0)
  silkscreen extent -1.3,-0.77 1.3,0.77, body extent -1.1,-0.7 1.1,0.7, height 1.35
C1206_H1P15 [mm]
  rect 1.4x1.78 smd mask+0.05: 1(-1.4,0) 2(1.4,0)
  silkscreen extent -2.12,-0.97 2.15,0.97, body extent -1.7,-0.9 1.7,0.9, height 1.35
CON_SAMTEC_SSW-106-03-X-S [mm]
  rect 1.85x1.85 / inner round 1.85 / far side rect 1.85x1.85 hole 1.1 mask+0.05: 1(-6.35,0)
  round 1.85 hole 1.1 mask+0.05: 2(-3.81,0) 3(-1.27,0) 4(1.27,0) 5(3.81,0) 6(6.35,0)
  silkscreen extent -7.88,-1.2 7.88,1.2, body extent -7.88,-1.21 7.88,1.21, height 8.51
CON_SAMTEC_SSW-108-03-X-S [mm]
  rect 1.85x1.85 / inner round 1.85 / far side rect 1.85x1.85 hole 1.1 mask+0.05: 1(-8.89,0)
  round 1.85 hole 1.1 mask+0.05: 2(-6.35,0) 3(-3.81,0) 4(-1.27,0) 5(1.27,0) 6(3.81,0) 7(6.35,0) 8(8.89,0)
  silkscreen extent -10.42,-1.2 10.42,1.2, body extent -10.42,-1.21 10.42,1.21, height 8.51
CON_SAMTEC_SSW-110-03-X-S [mm]
  rect 1.85x1.85 / inner round 1.85 / far side rect 1.85x1.85 hole 1.1 mask+0.05: 1(-11.43,0)
  round 1.85 hole 1.1 mask+0.05: 2(-8.89,0) 3(-6.35,0) 4(-3.81,0) 5(-1.27,0) 6(1.27,0) 7(3.81,0) 8(6.35,0) 9(8.89,0) 10(11.43,0)
  silkscreen extent -12.96,-1.2 12.96,1.2, body extent -12.96,-1.21 12.96,1.21, height 8.51
CON_SAMTEC_TSW-102-07-G-S [mm]
  rect 1.85x1.85 / inner round 1.85 / far side rect 1.85x1.85 hole 1 mask+0.05: 1(-1.27,0)
  round 1.85 hole 1 mask+0.05: 2(1.27,0)
  silkscreen extent -2.58,-1.3 2.58,1.3, body extent -2.67,-1.3 2.58,1.3, height 8.38
CON_SAMTEC_TSW-102-09-X-S [mm]
  rect 1.85x1.85 / inner round 1.85 / far side rect 1.85x1.85 hole 1 mask+0.05: 1(-1.27,0)
  round 1.85 hole 1 mask+0.05: 2(1.27,0)
  silkscreen extent -2.64,-1.37 2.64,1.37, body extent -2.67,-1.3 2.58,1.3, height 8.38
CON_SAMTEC_TSW-103-07-F-S [mm]
  rect 1.85x1.85 / inner round 1.85 / far side rect 1.85x1.85 hole 1 mask+0.05: 1(-2.54,0)
  round 1.85 hole 1 mask+0.05: 2(0,0) 3(2.54,0)
  silkscreen extent -3.85,-1.3 3.85,1.3, body extent -3.91,-1.37 3.91,1.37, height 8.38
CON_SAMTEC_TSW-104-07-G-S [mm]
  rect 1.85x1.85 / inner round 1.85 / far side rect 1.85x1.85 hole 1 mask+0.05: 1(-3.81,0)
  round 1.85 hole 1 mask+0.05: 2(-1.27,0) 3(1.27,0) 4(3.81,0)
  silkscreen extent -5.12,-1.3 5.12,1.3, body extent -5.21,-1.37 5.18,1.37, height 8.38
CON_SAMTEC_TSW-104-07-X-D [mm]
  rect 1.85x1.85 / inner round 1.85 / far side rect 1.85x1.85 hole 1 mask+0.05: 1(-3.81,-1.27)
  round 1.85 hole 1 mask+0.05: 2(-3.81,1.27) 3(-1.27,-1.27) 4(-1.27,1.27) 5(1.27,-1.27) 6(1.27,1.27) 7(3.81,-1.27) 8(3.81,1.27)
  silkscreen extent -5.08,-2.54 5.08,2.54, body extent -5.08,-2.54 5.08,2.54, height 8.38
CON_SAMTEC_TSW-119-09-X-D [mm]
  rect 1.85x1.85 / inner round 1.85 / far side rect 1.85x1.85 hole 1 mask+0.05: 1(-22.86,-1.27)
  round 1.85 hole 1 mask+0.05: 2(-22.86,1.27) 3(-20.32,-1.27) 4(-20.32,1.27) 5(-17.78,-1.27) 6(-17.78,1.27) 7(-15.24,-1.27) 8(-15.24,1.27) 9(-12.7,-1.27) 10(-12.7,1.27) 11(-10.16,-1.27) 12(-10.16,1.27) 13(-7.62,-1.27) 14(-7.62,1.27) 15(-5.08,-1.27) 16(-5.08,1.27) 17(-2.54,-1.27) 18(-2.54,1.27) 19(0,-1.27) 20(0,1.27) 21(2.54,-1.27) 22(2.54,1.27) 23(5.08,-1.27) 24(5.08,1.27) 25(7.62,-1.27) 26(7.62,1.27) 27(10.16,-1.27) 28(10.16,1.27) 29(12.7,-1.27) 30(12.7,1.27) 31(15.24,-1.27) 32(15.24,1.27) 33(17.78,-1.27) 34(17.78,1.27) 35(20.32,-1.27) 36(20.32,1.27) 37(22.86,-1.27) 38(22.86,1.27)
  silkscreen extent -24.13,-2.54 24.13,2.54, body extent -24.13,-2.55 24.13,2.54, height 8.38
CON_STDC14_Receiver_MEDIUM_WITH_MIPI10_3D [mm] "compatible with FTSH-105-01-L-DV,-K and FTSH-107-01-L-DV,-K,-A,-P,-ES"
  round 0 hole 1.19 unplated mask+0.05: 0(-5.445,0) 0(5.445,0)
  round 0 hole 0.97 unplated mask+0.05: 0(-3.175,0) 0(3.175,0)
  rect 0.74x2.79 smd mask+0.05: 1(-3.81,-2.032) 2(-3.81,2.032) 3(-2.54,-2.032) 4(-2.54,2.032) 5(-1.27,-2.032) 6(-1.27,2.032) 7(0,-2.032) 8(0,2.032) 9(1.27,-2.032) 10(1.27,2.032) 11(2.54,-2.032) 12(2.54,2.032) 13(3.81,-2.032) 14(3.81,2.032)
  silkscreen extent -6.3,-4.38 6.3,3.6, body extent -6.3,-2.92 6.3,2.92, height 6.6
CON_USBMICROB_MOLEX_105017-0001_H2P90 [mm]
  rect 0.4x1.35 smd mask+0.05: 1(-1.3,4.15) 2(-0.65,4.15) 3(0,4.15) 4(0.65,4.15) 5(1.3,4.15)
  round 1.5 hole 0.9 mask+0.05: 6(-2.5,4.15) 7(2.5,4.15)
  oval 1.2x1.9 hole 0.6 slot 1.3 at 90 deg mask+0.05: 8(3.5,1.45) 9(-3.5,1.45)
  rect 1.5x1.9 smd mask+0.05: 10(-1,1.45) 11(1,1.45)
  Top Layer region: 2.3,2.4 3.5,2.4 3.5,0.5 2.3,0.5 2.3,2.4
  Top Layer region: -3.5,2.4 -2.3,2.4 -2.3,0.5 -3.5,0.5 -3.5,2.4
  silkscreen extent -4,-0.7 4,4.6, body extent -4.1,-1.15 4.1,4.66, height 2.9
CRY_NX2016SA_4P [mm]
  rect 0.85x0.75 smd mask+0.05: 1(-0.675,-0.525) 2(0.675,-0.525) 3(0.675,0.525) 4(-0.675,0.525)
  silkscreen extent -1.22,-1.02 1.05,0.85, body extent -1.05,-0.85 1.05,0.85, height 0.7
CRY_NX3215SA_2P [mm]
  rect 1x1.8 smd mask+0.05: 1(-1.25,0) 2(1.25,0)
  silkscreen extent -0.63,-0.8 0.63,0.8, body extent -1.65,-0.8 1.65,0.8, height 0.9
DIO_SOD323 [mm]
  rect 1.06x0.54 smd mask+0.05: 1(-1.07,0) 2(1.07,0)
  silkscreen extent -0.9,-0.72 0.9,0.72, body extent -1.3,-0.78 1.3,0.78, height 1.17
ESD_QFN2_1P6X1_P125 [mm]
  rect 0.55x0.8 smd mask+0.05: 1(-0.625,0) 2(0.625,0)
  silkscreen extent -1,-0.55 0.85,0.55, body extent -0.85,-0.55 0.85,0.55, height 0.61
ESD_QFN-6L_1P7X1P5_P050 [mm]
  rect 0.25x0.6 smd mask+0.05: 1(-0.5,-0.65) 2(0,-0.65) 3(0.5,-0.65) 4(0.5,0.65) 5(0,0.65) 6(-0.5,0.65)
  silkscreen extent -0.9,-0.8 0.9,0.8, body extent -0.9,-0.8 0.9,0.8, height 0.56
ESD_SOT323-5L [mm]
  rect 0.4x1.2 smd mask+0.05: 1(-0.65,-0.85) 2(0,-0.85) 3(0.65,-0.85) 4(0.65,0.85) 5(-0.65,0.85)
  silkscreen extent -1.22,-1.21 1.22,0.77, body extent -1.15,-1.05 1.15,1.05, height 1.1
ESD_ST0201 [mm]
  rect 0.425x0.33 smd mask+0.05: 1(-0.312,0) 2(0.312,0)
  silkscreen extent -0.55,-0.3 0.33,0.3, body extent -0.34,-0.18 0.34,0.18, height 0.34
ICC_DFN6-EPAD_3X3_P095 [mm]
  rect 0.45x0.5 smd mask+0.05: 1(-0.95,-1.3) 2(0,-1.3) 3(0.95,-1.3) 4(0.95,1.3) 5(0,1.3) 6(-0.95,1.3)
  rect 2.5x1.7 smd mask+0.05: EP(0,0)
  silkscreen extent -1.55,-1.55 1.55,1.55, body extent -1.55,-1.55 1.55,1.55, height 1
ICC_LQFP64_10X10_P050_SOCKET_YAMAICHI_IC149-064-069-B5_NM [mm]
  rect 1x2.5 smd rot 45 mask+0.05: 0(-6,-6) 0(6,6)
  rect 1x2.5 smd rot 135 mask+0.05: 0(-6,6) 0(6,-6)
  round 0.5 hole 1 unplated mask+0.05: 0(0,-3.1) 0(0,3.1)
  rect 0.3x1.7 smd mask+0.05: 1(-3.75,-5.9) 2(-3.25,-5.9) 3(-2.75,-5.9) 4(-2.25,-5.9) 5(-1.75,-5.9) 6(-1.25,-5.9) 7(-0.75,-5.9) 8(-0.25,-5.9) 9(0.25,-5.9) 10(0.75,-5.9) 11(1.25,-5.9) 12(1.75,-5.9) 13(2.25,-5.9) 14(2.75,-5.9) 15(3.25,-5.9) 16(3.75,-5.9) 33(3.75,5.9) 34(3.25,5.9) 35(2.75,5.9) 36(2.25,5.9) 37(1.75,5.9) 38(1.25,5.9) 39(0.75,5.9) 40(0.25,5.9) 41(-0.25,5.9) 42(-0.75,5.9) 43(-1.25,5.9) 44(-1.75,5.9) 45(-2.25,5.9) 46(-2.75,5.9) 47(-3.25,5.9) 48(-3.75,5.9)
  rect 1.7x0.3 smd mask+0.05: 17(5.9,-3.75) 18(5.9,-3.25) 19(5.9,-2.75) 20(5.9,-2.25) 21(5.9,-1.75) 22(5.9,-1.25) 23(5.9,-0.75) 24(5.9,-0.25) 25(5.9,0.25) 26(5.9,0.75) 27(5.9,1.25) 28(5.9,1.75) 29(5.9,2.25) 30(5.9,2.75) 31(5.9,3.25) 32(5.9,3.75) 49(-5.9,3.75) 50(-5.9,3.25) 51(-5.9,2.75) 52(-5.9,2.25) 53(-5.9,1.75) 54(-5.9,1.25) 55(-5.9,0.75) 56(-5.9,0.25) 57(-5.9,-0.25) 58(-5.9,-0.75) 59(-5.9,-1.25) 60(-5.9,-1.75) 61(-5.9,-2.25) 62(-5.9,-2.75) 63(-5.9,-3.25) 64(-5.9,-3.75)
  silkscreen extent -5.05,-5.05 5.05,5.05, body extent -6,-6 6,6, height 1.6
ICC_SOT23-5L_H1P45 [mm]
  rect 0.6x1.3 smd mask+0.05: 1(-0.95,-1.1) 2(0,-1.1) 3(0.95,-1.1) 4(0.95,1.1) 5(-0.95,1.1)
  silkscreen extent -1.75,-1.68 1.6,0.97, body extent -1.52,-1.25 1.52,1.25, height 1.45
ICC_UFBGA201_176+25_10X10_P065 [mm] "IPC"
  round 0.25 smd mask+0.05: A1(-4.55,4.55) A2(-3.9,4.55) A3(-3.25,4.55) A4(-2.6,4.55) A5(-1.95,4.55) A6(-1.3,4.55) A7(-0.65,4.55) A8(0,4.55) A9(0.65,4.55) A10(1.3,4.55) A11(1.95,4.55) A12(2.6,4.55) A13(3.25,4.55) A14(3.9,4.55) A15(4.55,4.55) B1(-4.55,3.9) B2(-3.9,3.9) B3(-3.25,3.9) B4(-2.6,3.9) B5(-1.95,3.9) B6(-1.3,3.9) B7(-0.65,3.9) B8(0,3.9) B9(0.65,3.9) B10(1.3,3.9) B11(1.95,3.9) B12(2.6,3.9) B13(3.25,3.9) B14(3.9,3.9) B15(4.55,3.9) C1(-4.55,3.25) C2(-3.9,3.25) C3(-3.25,3.25) C4(-2.6,3.25) C5(-1.95,3.25) C6(-1.3,3.25) C7(-0.65,3.25) C8(0,3.25) C9(0.65,3.25) C10(1.3,3.25) C11(1.95,3.25) C12(2.6,3.25) C13(3.25,3.25) C14(3.9,3.25) C15(4.55,3.25) D1(-4.55,2.6) D2(-3.9,2.6) D3(-3.25,2.6) D4(-2.6,2.6) D5(-1.95,2.6) D6(-1.3,2.6) D7(-0.65,2.6) D8(0,2.6) D9(0.65,2.6) D10(1.3,2.6) D11(1.95,2.6) D12(2.6,2.6) D13(3.25,2.6) D14(3.9,2.6) D15(4.55,2.6) E1(-4.55,1.95) E2(-3.9,1.95) E3(-3.25,1.95) E4(-2.6,1.95) E12(2.6,1.95) E13(3.25,1.95) E14(3.9,1.95) E15(4.55,1.95) F1(-4.55,1.3) F2(-3.9,1.3) F3(-3.25,1.3) F4(-2.6,1.3) F6(-1.3,1.3) F7(-0.65,1.3) F8(0,1.3) F9(0.65,1.3) F10(1.3,1.3) F12(2.6,1.3) F13(3.25,1.3) F14(3.9,1.3) F15(4.55,1.3) G1(-4.55,0.65) G2(-3.9,0.65) G3(-3.25,0.65) G4(-2.6,0.65) G6(-1.3,0.65) G7(-0.65,0.65) G8(0,0.65) G9(0.65,0.65) G10(1.3,0.65) G12(2.6,0.65) G13(3.25,0.65) G14(3.9,0.65) G15(4.55,0.65) H1(-4.55,0) H2(-3.9,0) H3(-3.25,0) H4(-2.6,0) H6(-1.3,0) H7(-0.65,0) H8(0,0) H9(0.65,0) H10(1.3,0) H12(2.6,0) H13(3.25,0) H14(3.9,0) H15(4.55,0) J1(-4.55,-0.65) J2(-3.9,-0.65) J3(-3.25,-0.65) J4(-2.6,-0.65) J6(-1.3,-0.65) J7(-0.65,-0.65) J8(0,-0.65) J9(0.65,-0.65) J10(1.3,-0.65) J12(2.6,-0.65) J13(3.25,-0.65) J14(3.9,-0.65) J15(4.55,-0.65) K1(-4.55,-1.3) K2(-3.9,-1.3) K3(-3.25,-1.3) K4(-2.6,-1.3) K6(-1.3,-1.3) K7(-0.65,-1.3) K8(0,-1.3) K9(0.65,-1.3) K10(1.3,-1.3) K12(2.6,-1.3) K13(3.25,-1.3) K14(3.9,-1.3) K15(4.55,-1.3) L1(-4.55,-1.95) L2(-3.9,-1.95) L3(-3.25,-1.95) L4(-2.6,-1.95) L12(2.6,-1.95) L13(3.25,-1.95) L14(3.9,-1.95) L15(4.55,-1.95) M1(-4.55,-2.6) M2(-3.9,-2.6) M3(-3.25,-2.6) M4(-2.6,-2.6) M5(-1.95,-2.6) M6(-1.3,-2.6) M7(-0.65,-2.6) M8(0,-2.6) M9(0.65,-2.6) M10(1.3,-2.6) M11(1.95,-2.6) M12(2.6,-2.6) M13(3.25,-2.6) M14(3.9,-2.6) M15(4.55,-2.6) N1(-4.55,-3.25) N2(-3.9,-3.25) N3(-3.25,-3.25) N4(-2.6,-3.25) N5(-1.95,-3.25) N6(-1.3,-3.25) N7(-0.65,-3.25) N8(0,-3.25) N9(0.65,-3.25) N10(1.3,-3.25) N11(1.95,-3.25) N12(2.6,-3.25) N13(3.25,-3.25) N14(3.9,-3.25) N15(4.55,-3.25) P1(-4.55,-3.9) P2(-3.9,-3.9) P3(-3.25,-3.9) P4(-2.6,-3.9) P5(-1.95,-3.9) P6(-1.3,-3.9) P7(-0.65,-3.9) P8(0,-3.9) P9(0.65,-3.9) P10(1.3,-3.9) P11(1.95,-3.9) P12(2.6,-3.9) P13(3.25,-3.9) P14(3.9,-3.9) P15(4.55,-3.9) R1(-4.55,-4.55) R2(-3.9,-4.55) R3(-3.25,-4.55) R4(-2.6,-4.55) R5(-1.95,-4.55) R6(-1.3,-4.55) R7(-0.65,-4.55) R8(0,-4.55) R9(0.65,-4.55) R10(1.3,-4.55) R11(1.95,-4.55) R12(2.6,-4.55) R13(3.25,-4.55) R14(3.9,-4.55) R15(4.55,-4.55)
  silkscreen extent -5.22,-5.07 5.07,5.23, body extent -5.07,-5.07 5.07,5.07, height 0.61
L0603 [mm]
  rect 0.8x0.95 smd mask+0.05: 1(-0.8,0) 2(0.8,0)
  silkscreen extent -1.33,-0.6 1.33,0.6, body extent -0.87,-0.47 0.87,0.47, height 0.95
LED_0603_GREEN [mm]
  rect 0.8x0.8 smd mask+0.05: 1(-0.75,0) 2(0.75,0)
  silkscreen extent -0.25,-0.4 1.25,0.4, body extent -0.8,-0.4 0.8,0.4, height 0.6
LED_0603_RED [mm]
  rect 0.8x0.8 smd mask+0.05: 1(-0.75,0) 2(0.75,0)
  silkscreen extent -0.25,-0.4 1.25,0.4, body extent -0.8,-0.4 0.8,0.4, height 0.6
LED_BI-GR_HSMF-A201-A00J1 [mm]
  rect 1.1x1.5 smd mask+0.05: 1(-0.75,-1.5) 2(-0.75,1.5) 3(0.75,1.5) 4(0.75,-1.5)
  silkscreen extent -1.65,-1.85 1.65,1.85, body extent -1.5,-1.85 1.5,1.85, height 2.1
LOGO_CE [mm]
  silkscreen extent -1.61,-1.37 1.85,1.07
LOGO_MAIN_1 [mm]
  silkscreen extent -3.36,-2.51 3.52,3.76
LOGO_ST [mm]
  silkscreen extent -6.18,-2.95 5.25,3.14
MIRE_PLACE_SMD_0P8MM [mm]
  round 0.8 smd paste-10 mask+0.2: 1(0,0)
  Top Layer keep-out circle w0.01: c0,0 r0.804
MOS_SOT23-5L [mm]
  rect 0.6x1.3 smd mask+0.05: 1(-0.95,-1.1) 2(0,-1.1) 3(0.95,-1.1) 4(0.95,1.1) 5(-0.95,1.1)
  silkscreen extent -1.6,-0.95 1.6,0.97, body extent -1.52,-1.25 1.52,1.25, height 1.45
NPN_SOT23 [mm]
  rect 1x1.4 smd mask+0.05: 1(-0.95,-1.1) 2(0.95,-1.1) 3(0,1.1)
  silkscreen extent -1.63,-0.82 1.63,0.82, body extent -1.56,-1.25 1.56,1.25, height 1.1
OSC_NDK_NZ2520SB_4P [mm]
  rect 1x1 smd mask+0.05: 1(-0.825,-0.625) 2(0.825,-0.625) 3(0.825,0.625) 4(-0.825,0.625)
  silkscreen extent -1.43,-1.22 1.2,1.05, body extent -1.3,-1.05 1.3,1.05, height 0.91
R0402 [mm]
  rect 0.51x0.7 smd mask+0.05: 1(-0.45,0) 2(0.45,0)
  silkscreen extent -0.72,-0.43 0.72,0.43, body extent -0.52,-0.3 0.52,0.3, height 0.4
R0603 [mm]
  rect 0.64x1 smd mask+0.05: 1(-0.7,0) 2(0.7,0)
  silkscreen extent -1.05,-0.58 1.05,0.58, body extent -0.9,-0.5 0.9,0.5, height 0.56
REG_SOT23-5L [mm]
  rect 0.6x1.3 smd mask+0.05: 1(-0.95,-1.1) 2(0,-1.1) 3(0.95,-1.1) 4(0.95,1.1) 5(-0.95,1.1)
  silkscreen extent -1.6,-0.95 1.6,0.97, body extent -1.52,-1.25 1.52,1.25, height 1.1
REG_SOT223-TAB [mm]
  rect 1.5x1.65 smd mask+0.05: 1(-2.3,-3.175) 2(0,-3.175) 3(2.3,-3.175)
  rect 3.5x1.65 smd mask+0.05: 4(0,3.175)
  silkscreen extent -3.35,-2.15 3.35,2.12, body extent -3.35,-3.48 3.35,3.48, height 1.8
Sheetbox_4L2S [mil] "Sheetbox 4 layers / 2 silkscreens"
  round 20 on Mech16: 1(813.78,210.69) 1(2736.9,210.69)
SOLDER-BRIDGE_R0603-0R [mil]
  round 10 smd paste-393.7: 1(-19.68,0) 2(23.62,0)
  Top Layer region: -47.24,-19.68 -47.24,19.68 -15.75,19.68 3.94,0 -15.75,-19.68 -47.24,-19.68
  Top Layer region: -5.91,19.68 13.78,0 -5.91,-19.68 47.24,-19.68 47.24,19.68 -5.91,19.68
  silkscreen extent -50,-23 50,23, body extent -36,-20 36,20, height 22
SWI_WEALTHMETAL_TD-0341_4P_BLACK [mm]
  rect 1.52x2.16 smd mask+0.05: 1(-2.25,-4.75) 2(-2.25,4.75) 3(2.25,-4.75) 4(2.25,4.75)
  silkscreen extent -3,-3.5 3,3.5, body extent -3,-5.15 3,5.15, height 7.55
SWI_WEALTHMETAL_TD-0341_4P_BLUE [mm]
  rect 1.52x2.16 smd mask+0.05: 1(-2.25,-4.75) 2(-2.25,4.75) 3(2.25,-4.75) 4(2.25,4.75)
  silkscreen extent -3,-3.5 3,3.5, body extent -3,-5.15 3,5.15, height 7.55